# Altium PCB ETR_CELLMETER_MASTER.PcbDoc (part 1 of 3)
Units mm, origin at the board's own origin, x right, y up, seen from the top; angles counter-clockwise.
Board outline 110 x 70.06 mm, 4 copper layers (Top Layer, Top Inner, Bottom Inner, Bottom Layer), stack 0.96 mm thick; 181 components, 86 nets, 555 pads, 321 vias.
Unrouted connection lines stored in the file: 15.
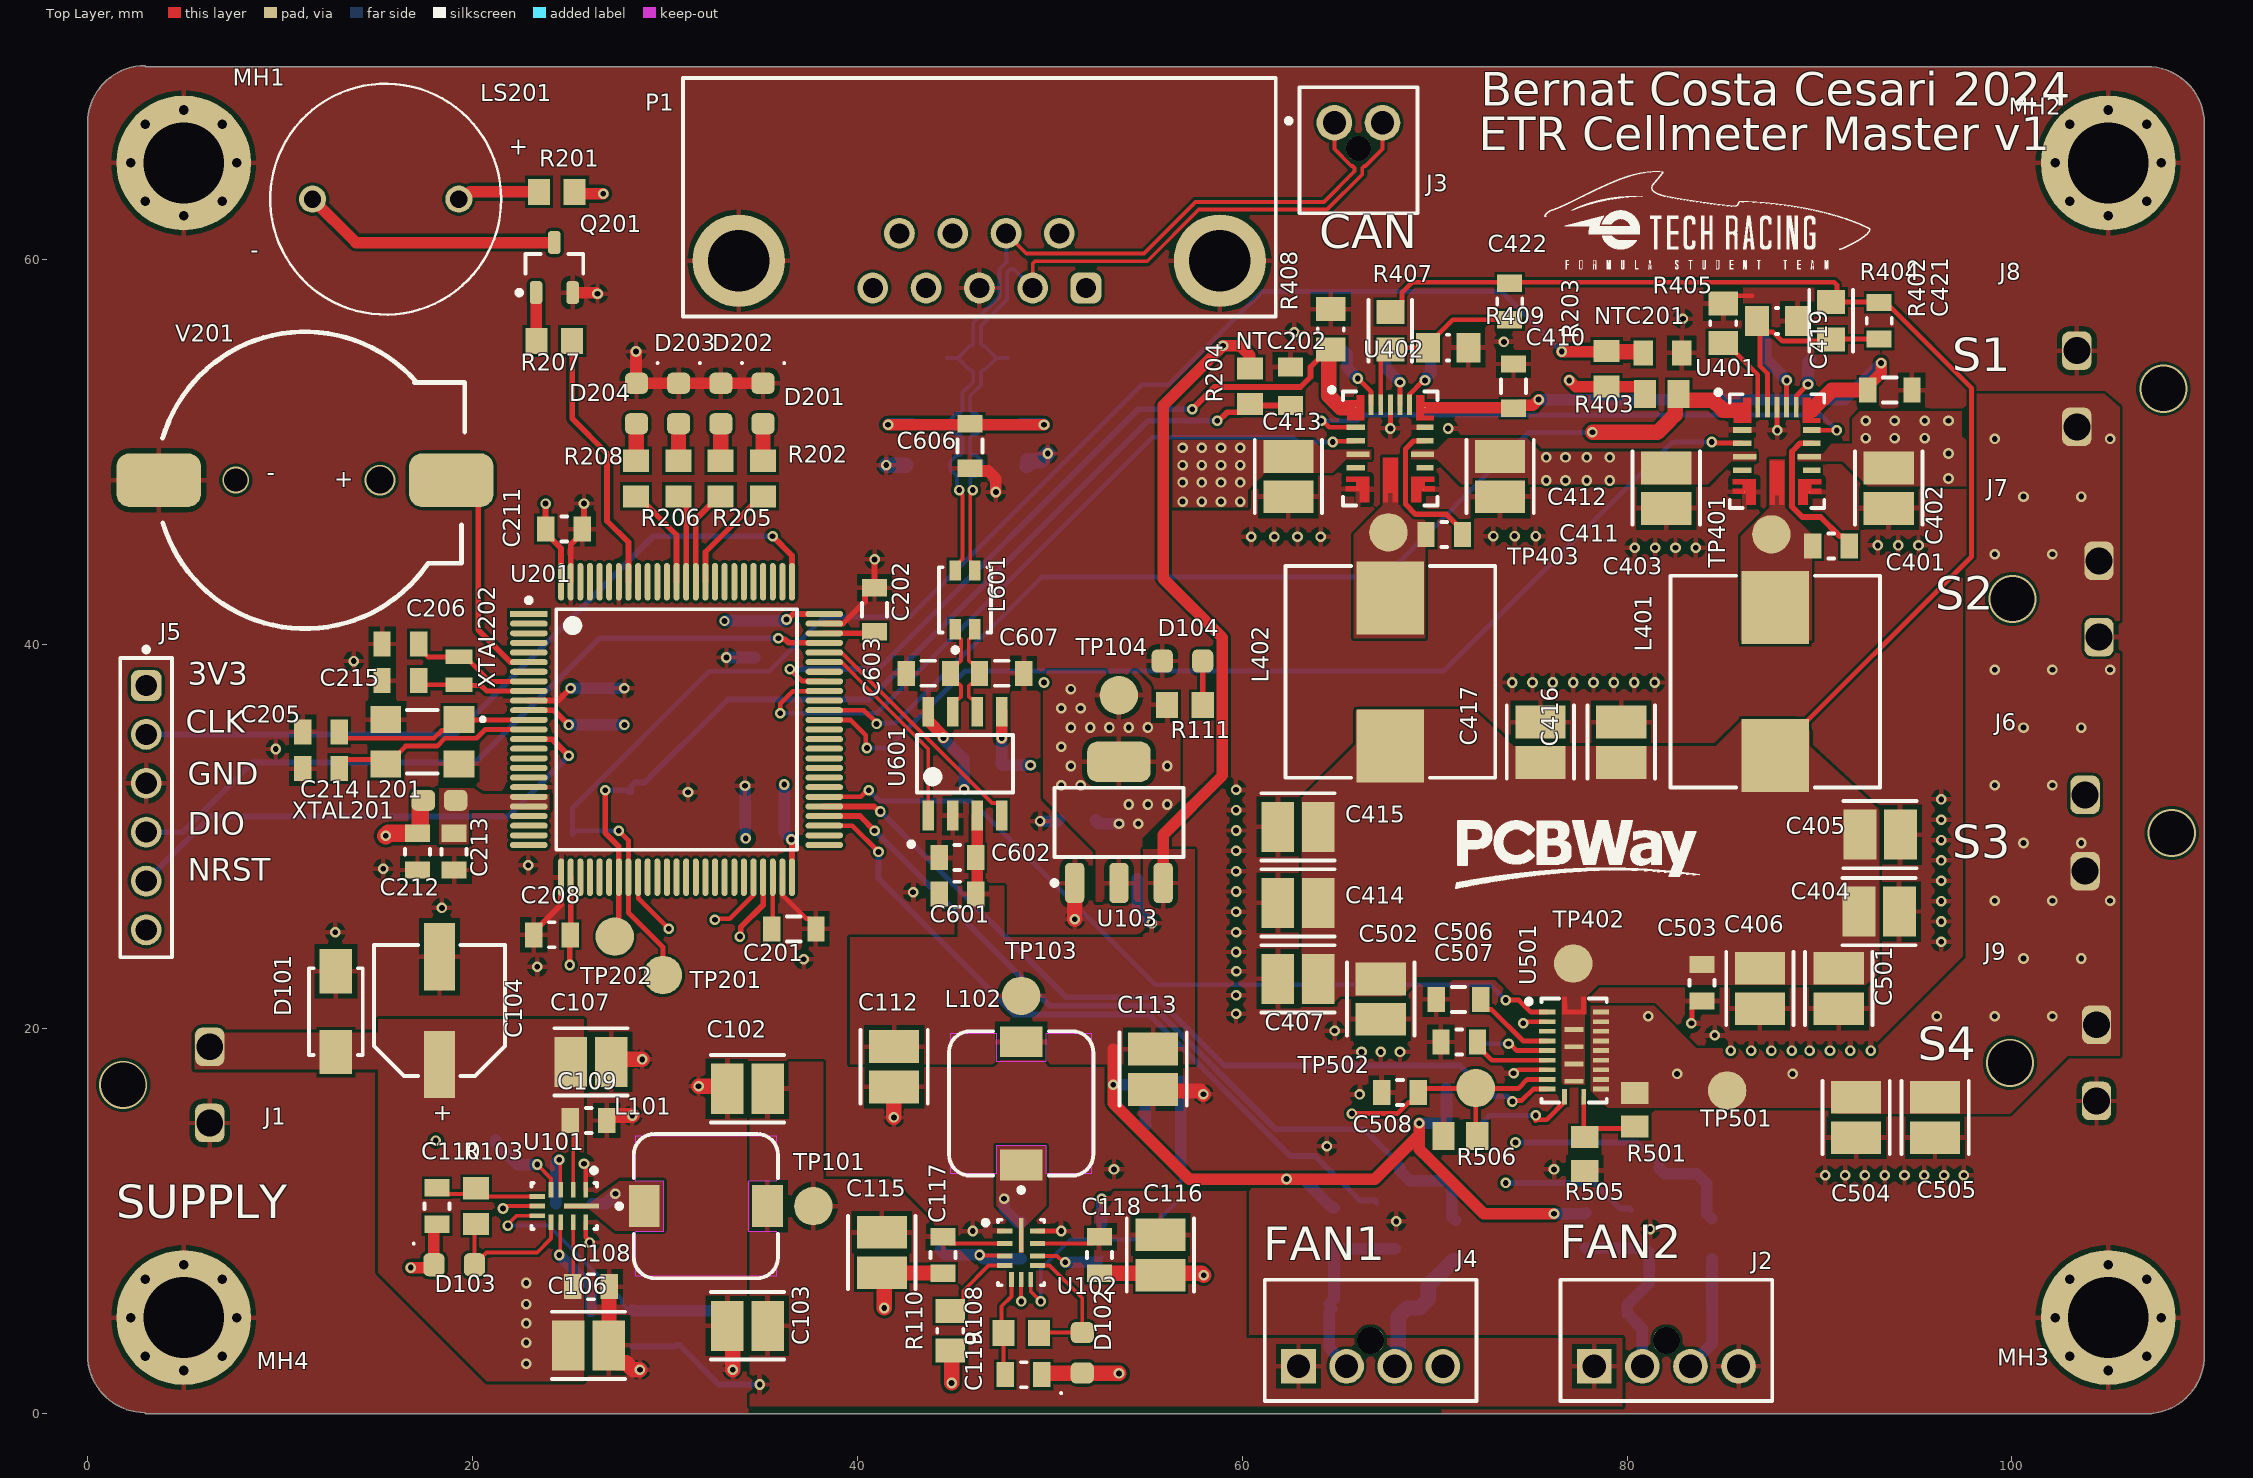
[diagram p0: Top Layer view]
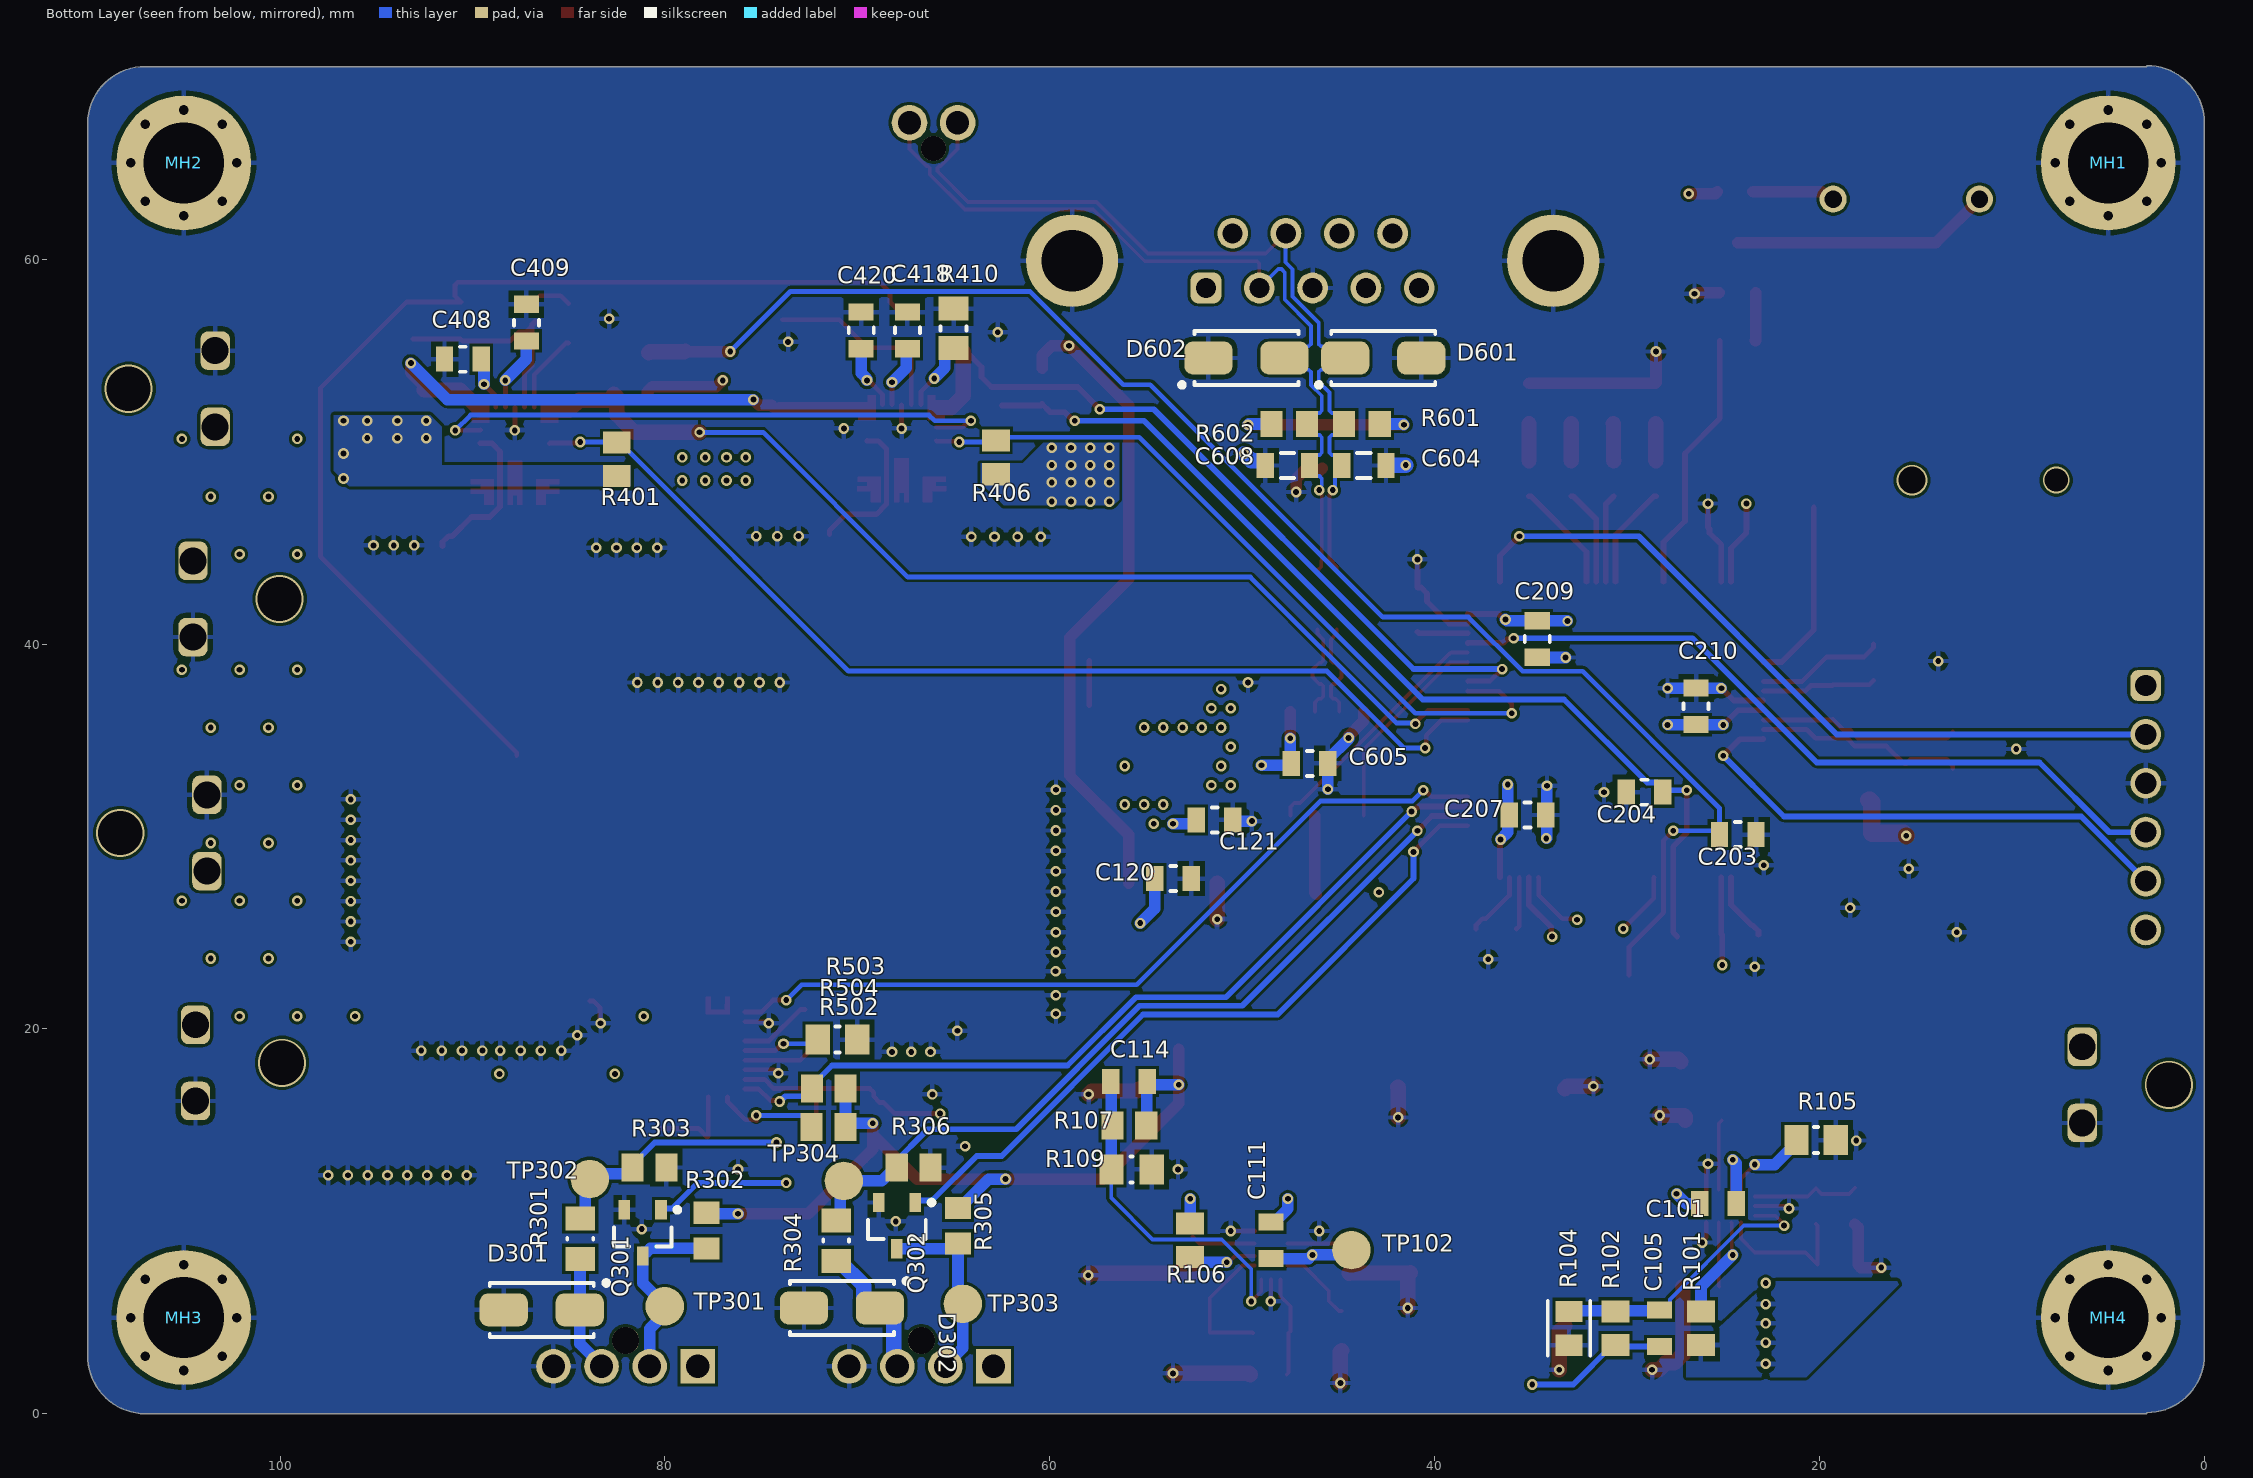
[diagram p1: Bottom Layer view, seen from below]
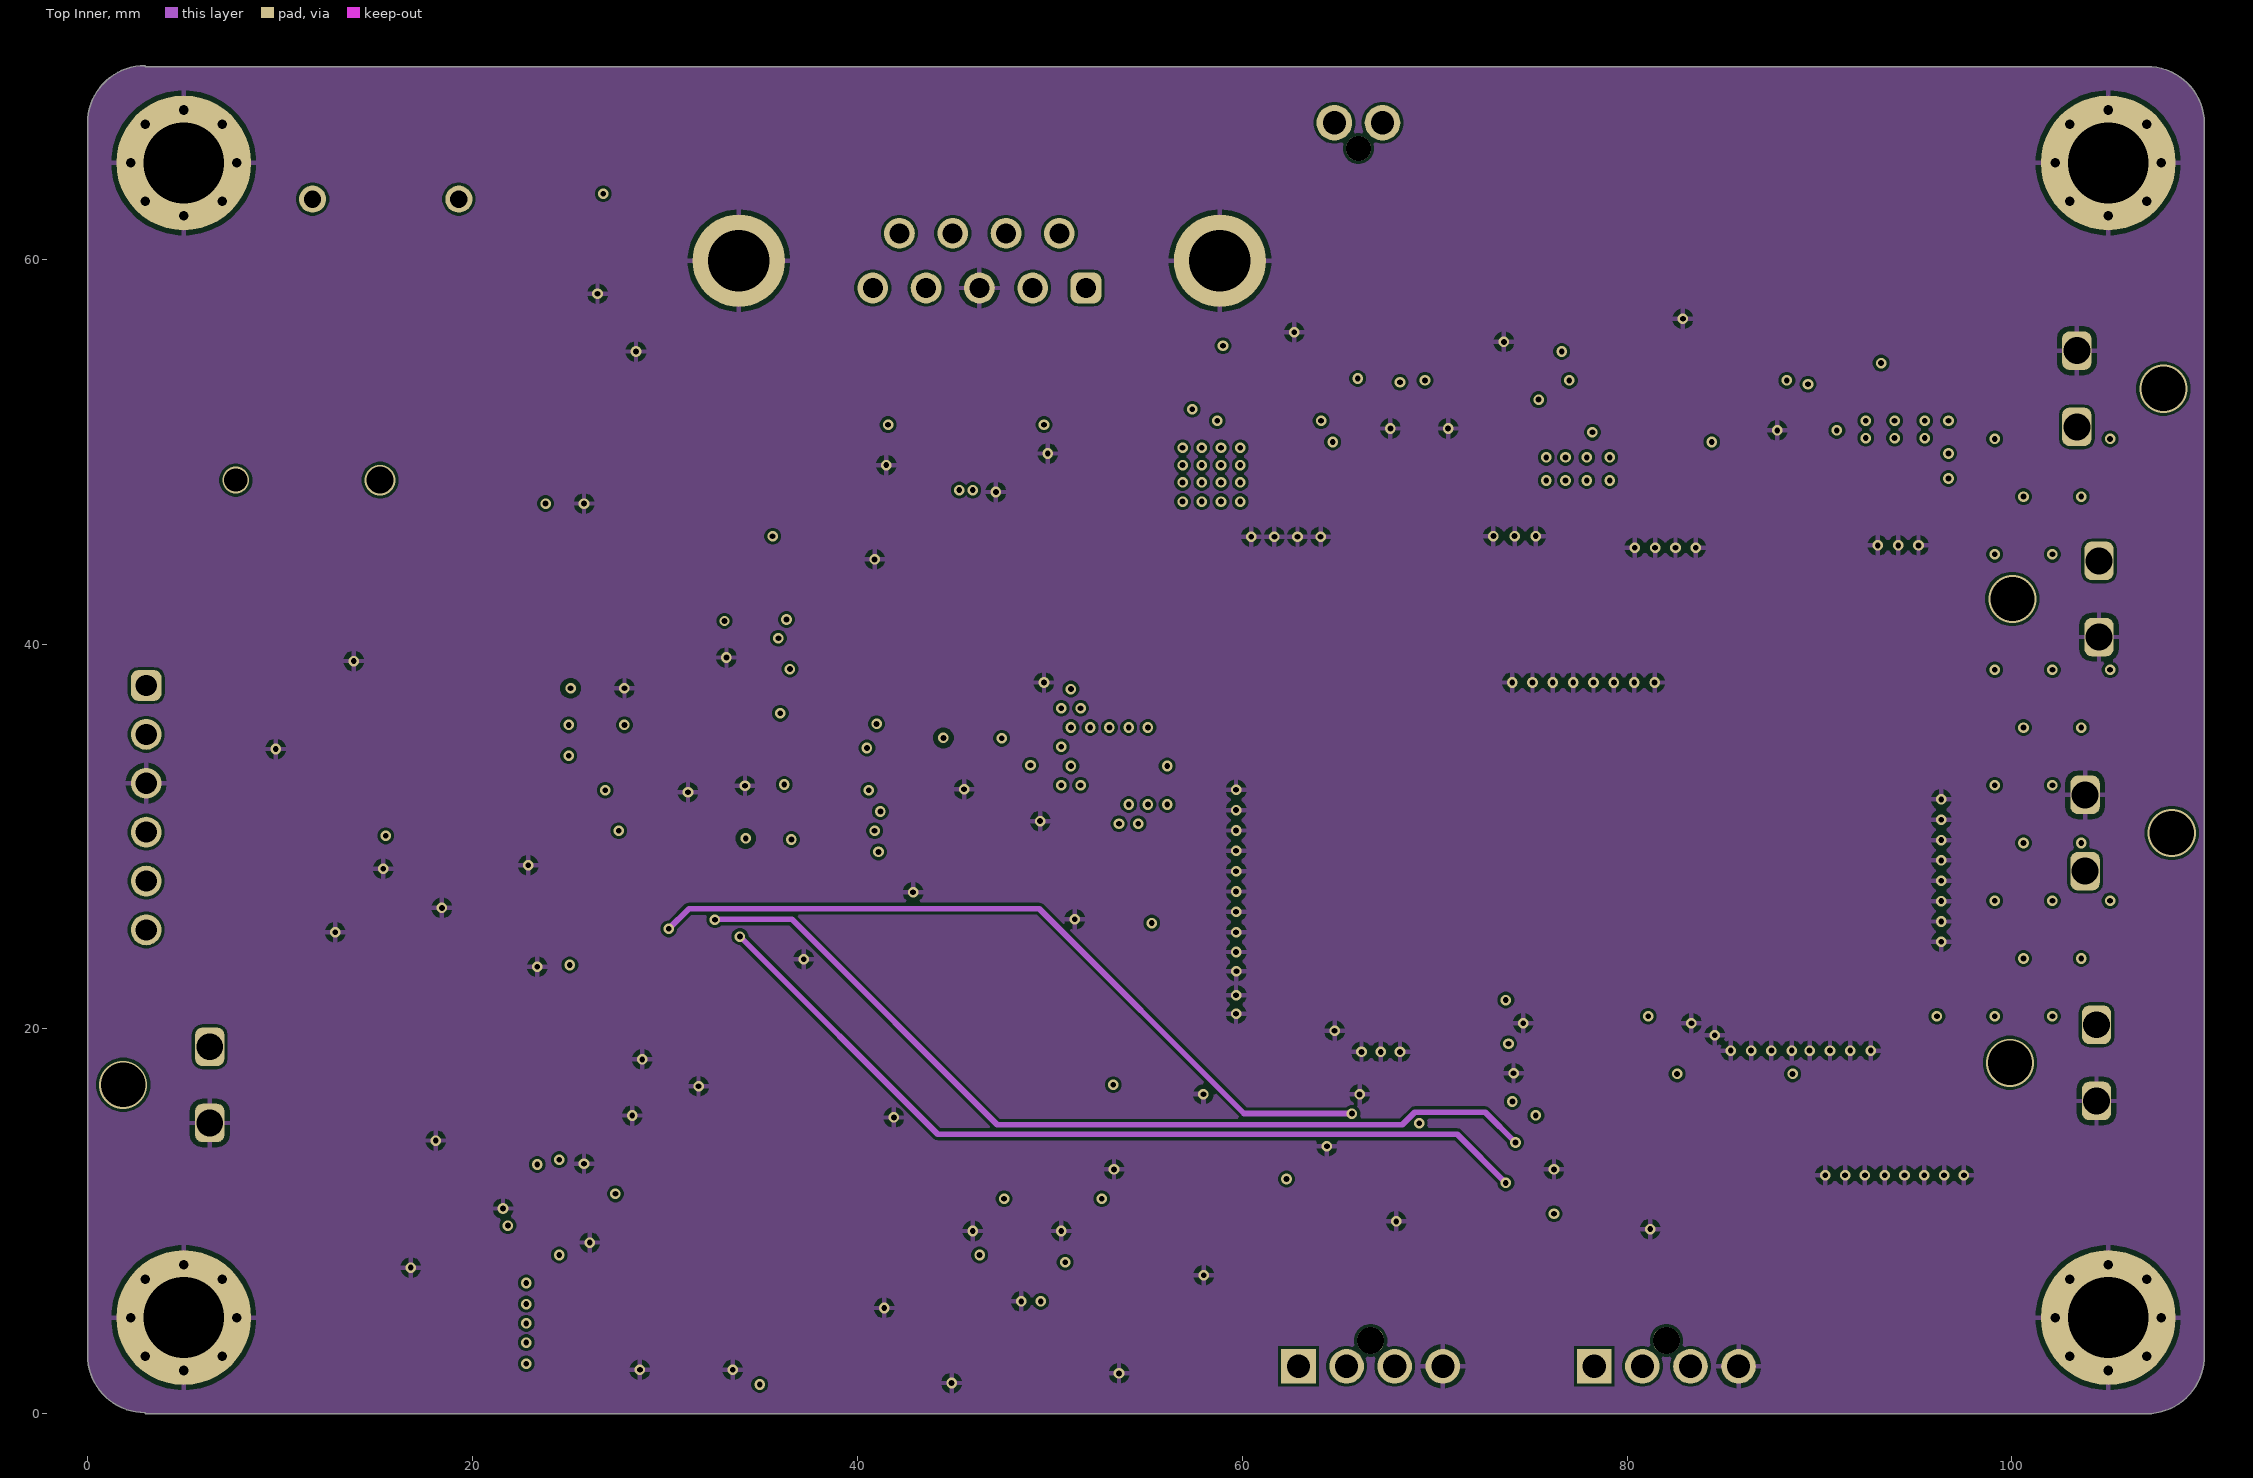
[diagram p2: Top Inner]
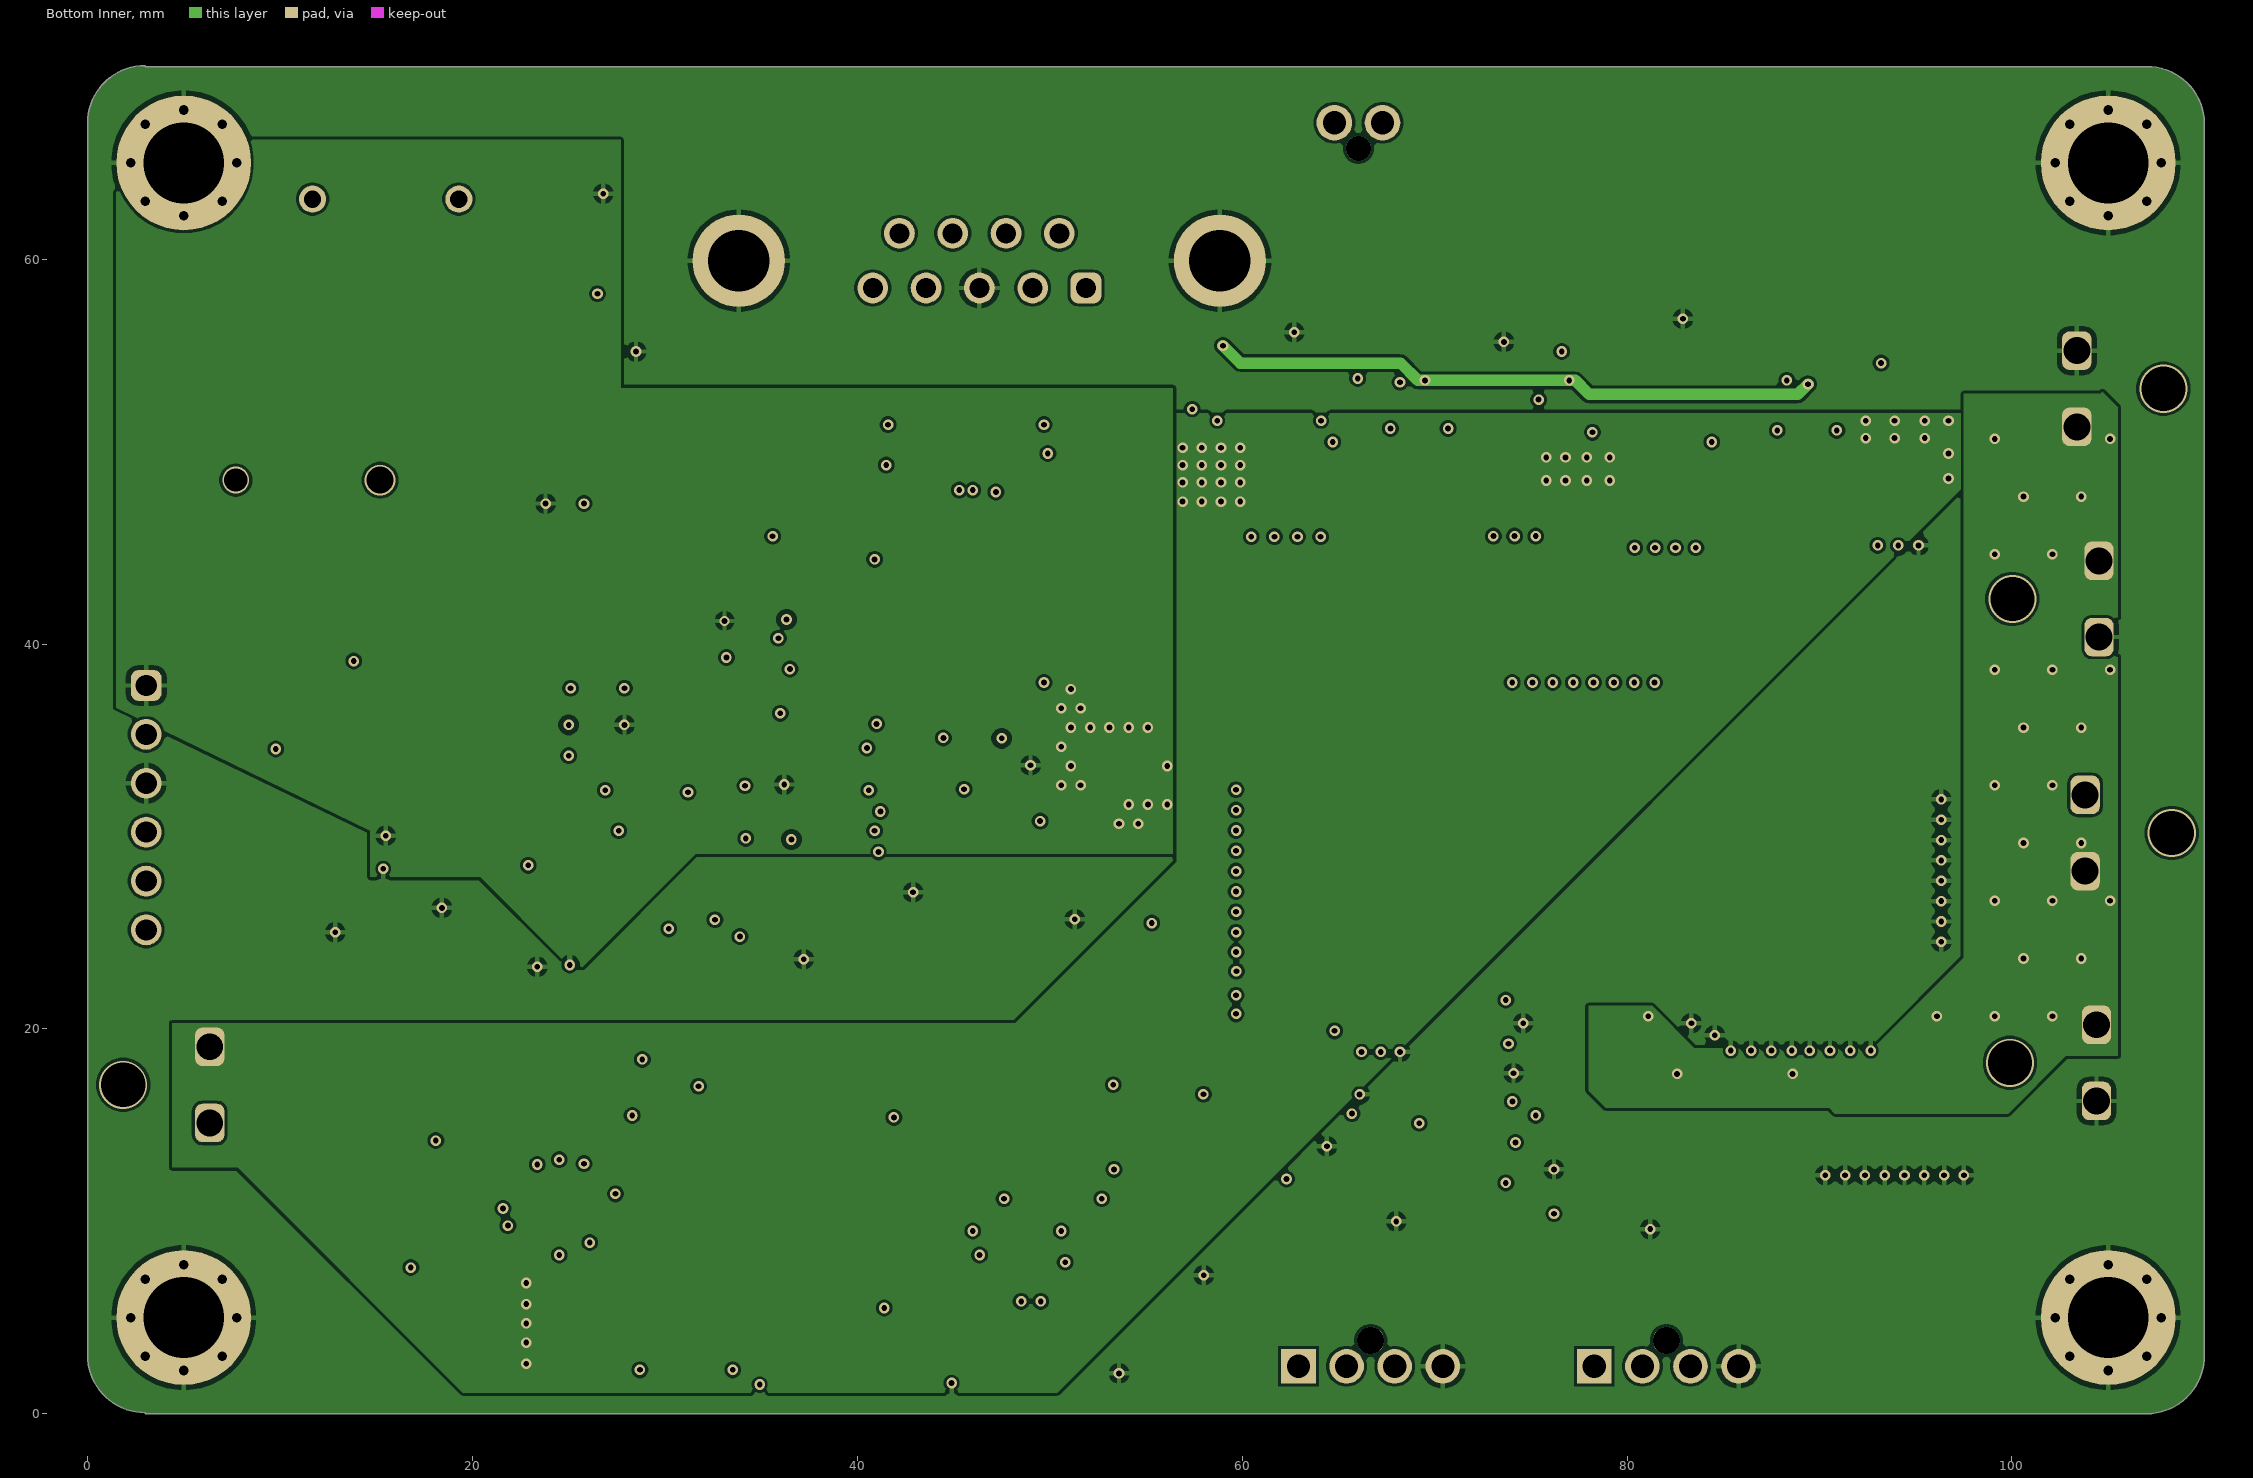
[diagram p3: Bottom Inner]
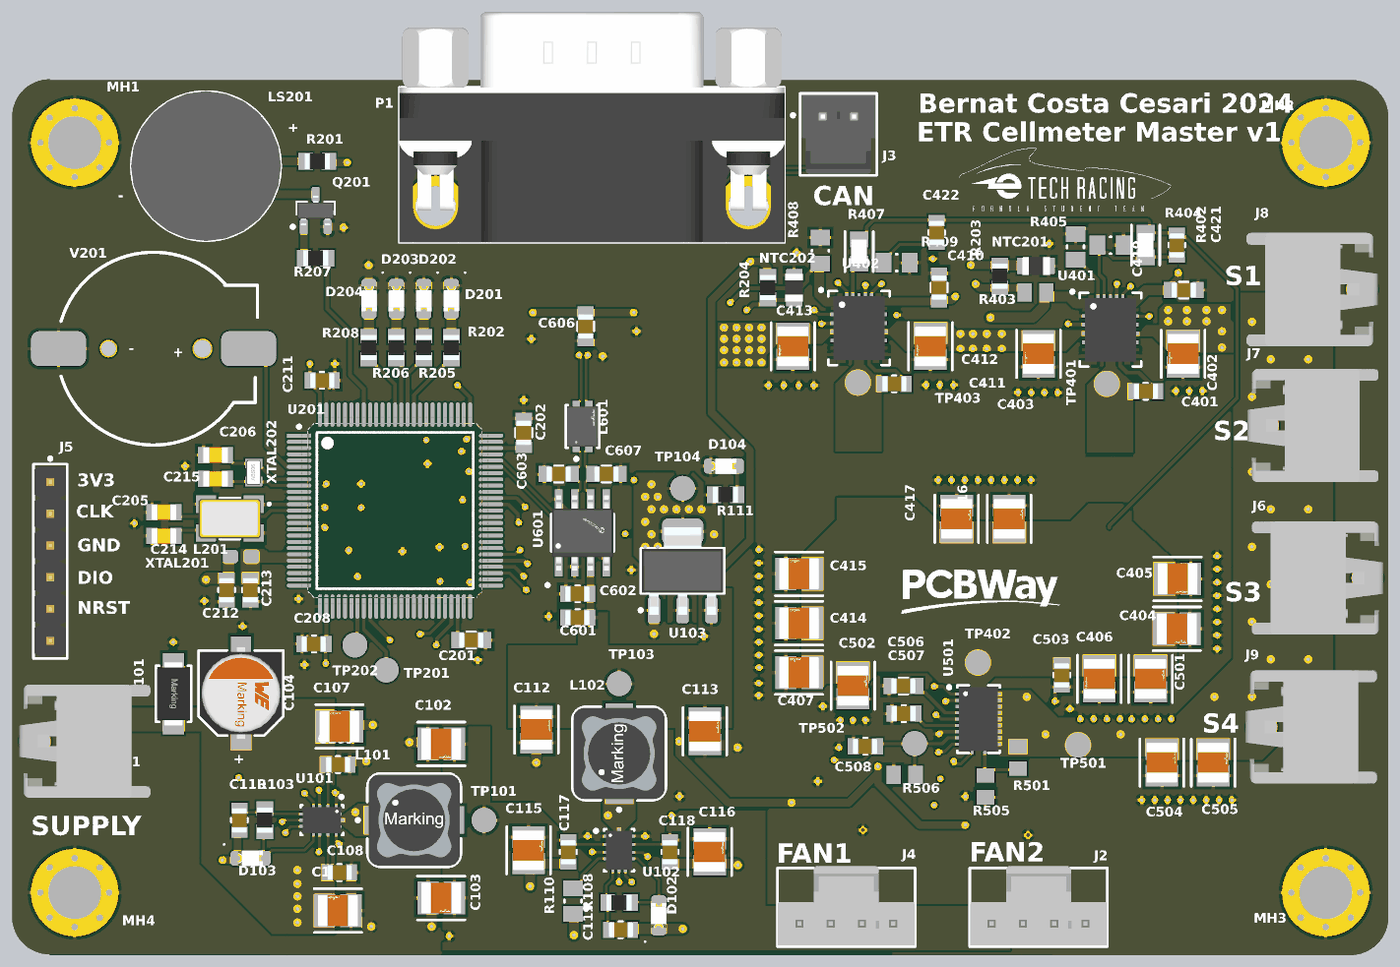
[diagram p5: 3D render of the assembled board from above, using the file's embedded part models]
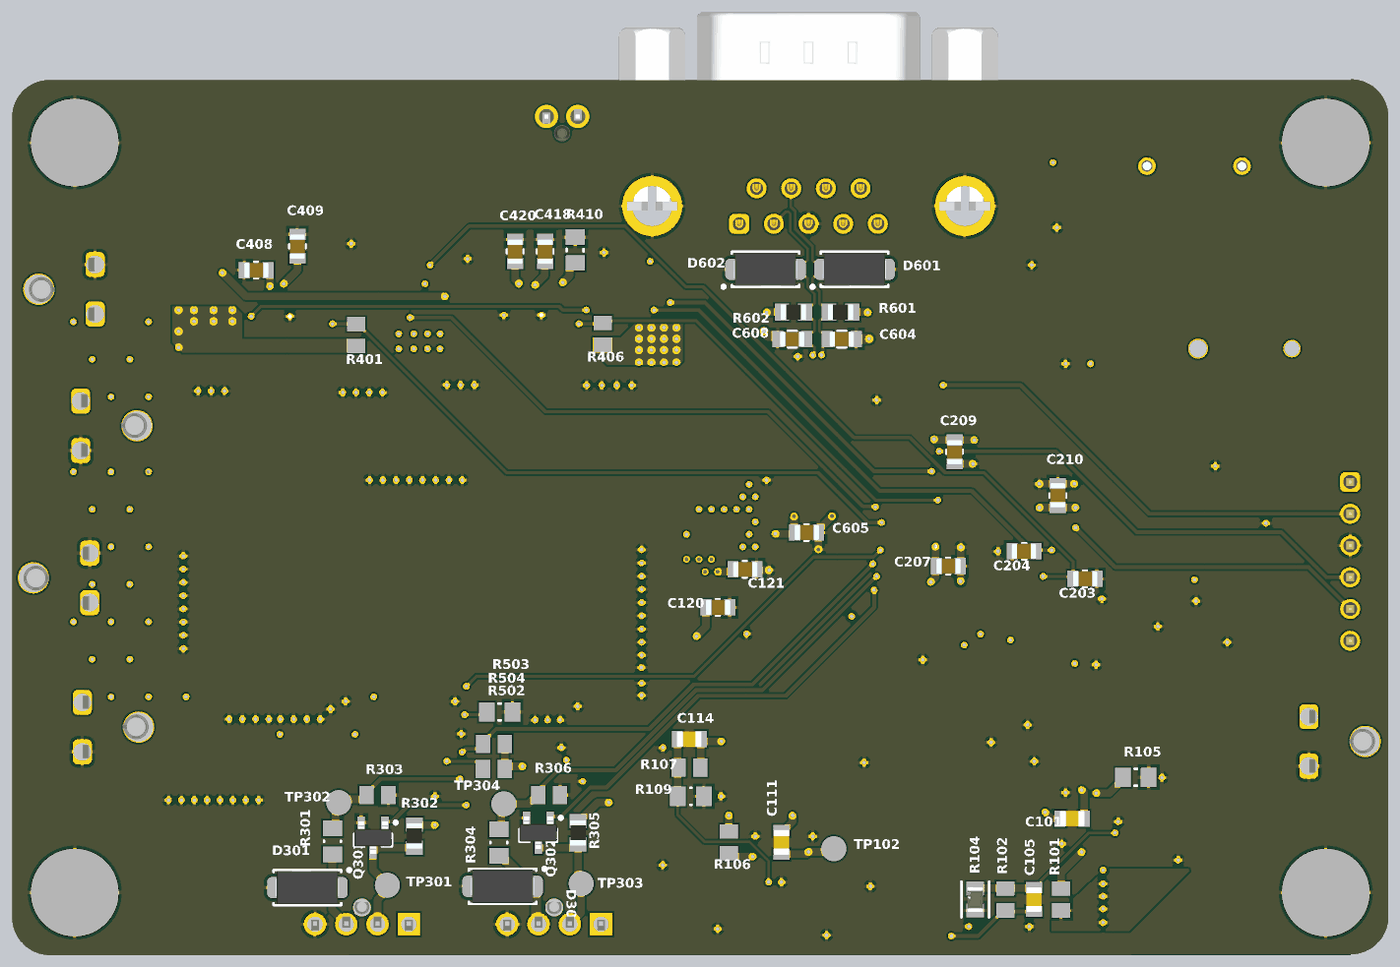
[diagram p6: 3D render of the assembled board from below, using the file's embedded part models]

## Layer stack, top to bottom
Top Solder: solder mask 0.01, Solder Resist, Dk 3.5
Top Layer: signal copper 0.035
Dielectric 4: core 0.11, Core-009, Dk 4.5
Top Inner: signal copper 0.035
Dielectric 1: dielectric 0.6, FR-4, Dk 4.8
Bottom Inner: signal copper 0.035
Dielectric 5: core 0.11, Core-009, Dk 4.5
Bottom Layer: signal copper 0.035
Bottom Solder: solder mask 0.01, Solder Resist, Dk 3.5

## Board outline
0,3.061 0,67.061 cw(c3,67.061) 3,70.061 3,70 107,70 cw(c107.03,67.03) 110,67.061 110,3.061 cw(c106.97,3.03) 107,0 3,0 3,0.061 cw(c3,3.061)

## Design rules (kind name [scope] priority, off if disabled: settings)
Clearance Clearance_1 [IsPad And InComponent('V1')] p1: gap=0 ignorepadtopadclearanceinfootprint=FALSE
Clearance [All] p2: gap=0.15 ignorepadtopadclearanceinfootprint=TRUE
DiffPairsRouting [All] p1: maxlimit=0.254 minlimit=0.2 mostfreqgap=0.254 toplayer_prefgap=0.2 toplayer_minwidth=0.2 toplayer_maxwidth=0.381 toplayer_prefwidth=0.2 midlayer1_mingap=0.254 midlayer1_minwidth=0.381 midlayer1_maxwidth=0.381 midlayer1_prefwidth=0.381 midlayer2_mingap=0.254 midlayer2_minwidth=0.381 midlayer2_maxwidth=0.381 midlayer2_prefwidth=0.381 bottomlayer_prefgap=0.2 bottomlayer_minwidth=0.2 bottomlayer_maxwidth=0.381 bottomlayer_prefwidth=0.2 maxuncoupledlength=12.7
HoleSize [All] p1: absolutevalues=TRUE maxlimit=6 minlimit=0.025 maxpercent=80.000 minpercent=20.000
HoleToHoleClearance [All] p1: gap=0.15 allowstackedmicrovias=TRUE
MinimumSolderMaskSliver [All] p1: minsoldermaskwidth=0.15
PolygonConnect PolygonDirect [Name Like '*_DIRECT'] p1: connectstyle=Direct reliefconductorwidth=0.254 reliefentries=4 polygonreliefangle="90 Angle" airgapwidth=0.254
PolygonConnect [All] p2: connectstyle=Relief reliefconductorwidth=0.254 reliefentries=4 polygonreliefangle="90 Angle" airgapwidth=0.254
RoutingVias [All] p1: holewidth=0.3 width=0.55 viastyle="Through Hole" minholewidth=0.3 minwidth=0.55 maxholewidth=0.7 maxwidth=1
SilkToSilkClearance [All] p1: silktosilkclearance=0
SilkToSolderMaskClearance [IsPad] p1: minsilkscreentomaskgap=0 clearancetoexposedcopper=TRUE
SolderMaskExpansion [All] p1: expansion=0.055 istentingtop=FALSE
SupplyNets "Schematic Supply Nets" [InNet('+12F')] p1: voltage=0.000
SupplyNets "Schematic Supply Nets_4" [InNet('+24')] p2: voltage=0.000
SupplyNets "Schematic Supply Nets_2" [InNet('+12S')] p3: voltage=0.000
SupplyNets "Schematic Supply Nets_11" [InNet('+12')] p4: voltage=0.000
SupplyNets "Schematic Supply Nets_9" [InNet('GND')] p5: voltage=0.000
SupplyNets "Schematic Supply Nets_7" [InNet('+5')] p6: voltage=0.000
SupplyNets "Schematic Supply Nets_6" [InNet('3V3_MCU')] p7: voltage=0.000
SupplyNets "Schematic Supply Nets_5" [InNet('3V3_A')] p8: voltage=0.000
Width [All] p1: maxlimit=5 minlimit=0.2 preferedwidth=0.2 minimp=50.000000 maximp=50.000000 favimp=50.000000
24 further rules are at their usual default settings.

## Classes and differential pairs
component class SS1: C401 C402 C403 C404 C405 C406 C407 C408 C409 C410 C411 C412 C413 C414 C415 C416 C417 C418 C419 C420 C421 C422 L401 L402 R401 R402 R403 R404 R405 R406 R407 R408 R409 R410 TP401 TP402 TP403 U401 U402
component class MCU: C201 C202 C203 C204 C205 C206 C207 C208 C209 C210 C211 C212 C213 C214 C215 D201 D202 D203 D204 L201 LS201 NTC201 NTC202 Q201 R201 R202 R203 R204 R205 R206 R207 R208 TP201 TP202 U201 V201 XTAL201 XTAL202
component class Master_Supply: C101 C102 C103 C104 C105 C106 C107 C108 C109 C110 C111 C112 C113 C114 C115 C116 C117 C118 C119 C120 C121 D101 D102 D103 D104 L101 L102 R101 R102 R103 R104 R105 R106 R107 R108 R109 R110 R111 TP101 TP102 TP103 TP104 U101 U102 U103
component class FUSE1: C501 C502 C503 C504 C505 C506 C507 C508 R501 R502 R503 R504 R505 R506 TP501 TP502 U501
component class ETR_CELLMETER_MASTER: J1 J2 J3 J4 J5 J6 J7 J8 J9 JS1 JS2 JS3 JS4 JS5 JS6 JS7 JS8 MH1 MH2 MH3 MH4 P1
component class Cooling: D301 D302 Q301 Q302 R301 R302 R303 R304 R305 R306 TP301 TP302 TP303 TP304
component class CAN: C601 C602 C603 C604 C605 C606 C607 C608 D601 D602 L601 R601 R602 U601
differential pair CAN_FIL: +CAN_FIL_H -CAN_FIL_L
differential pair CAN1: +CAN1_H -CAN1_L

## Components (designator, comment, footprint, x,y, rotation, side; value= is the part's Value field where it differs from the comment)
C101 "C47nF_0805" WCAP-CSGP_0805_L2W1.25H0.8_Reflow 25.273,10.922 r0 bottom value=47nF
C102 "C47µF" FP-GRM32E-0_3-0_2-IPC_C 34.29,16.891 r0 top value=47µF
C103 "C47µF 1210" FP-GRM32E-0_3-0_2-IPC_C 34.29,4.572 r0 top value=47µF
C104 "865080545011" WCAP-ASLI_D6.3H7.7 18.288,20.955 r270 top value=68µF
C105 "885012007051" WCAP-CSGP_0805_L2W1.25H0.6_Reflow 28.321,4.445 r270 bottom value=10pF
C106 "C47µF" FP-GRM32E-0_3-0_2-IPC_C 26.035,3.556 r180 top value=47µF
C107 "C47µF 1210" FP-GRM32E-0_3-0_2-IPC_C 26.162,18.288 r180 top value=47µF
C108 "C100n-50V-0805FNPC-X7R" C0805FNPC-R#1 26.162,6.604 r180 top value=100nF
C109 "C100n-50V-0805FNPC-X7R" C0805FNPC-R#1 26.035,15.24 r180 top value=100nF
C110 "C1u-50V-0805FNPC-X7R" C0805FNPC-R#1 18.161,10.795 r90 top value=1µF
C111 "885012207096" WCAP-CSGP_0805_L2W1.25H0.8_Reflow 48.514,9.017 r90 bottom value=47nF
C112 "C47µF" FP-GRM32E-0_3-0_2-IPC_C 41.91,18.034 r90 top value=47µF
C113 "C47µF 1210" FP-GRM32E-0_3-0_2-IPC_C 55.372,17.907 r90 top value=47µF
C114 "C10pF_0805_50V" WCAP-CSGP_0805_L2W1.25H0.6_Reflow 55.88,17.272 r180 bottom value=10pF
C115 "C47µF" FP-GRM32E-0_3-0_2-IPC_C 41.275,8.382 r90 top value=47µF
C116 "C47µF 1210" FP-GRM32E-0_3-0_2-IPC_C 55.753,8.255 r90 top value=47µF
C117 "C100n-50V-0805FNPC-X7R" C0805FNPC-R#1 44.45,8.255 r90 top value=100nF
C118 "C100n-50V-0805FNPC-X7R" C0805FNPC-R#1 52.578,8.255 r90 top value=100nF
C119 "C1u-50V-0805FNPC-X7R" C0805FNPC-R#1 48.641,2.032 r180 top value=1µF
C120 "C10u 0805" C0805FNPC-R#1 53.594,27.813 r0 bottom value=10µF
C121 "C10u 0805" C0805FNPC-R#1 51.435,30.861 r0 bottom value=10µF
C201 "2,2uF 0805" C0805FNPC-W 36.7,25.2 r0 top value=22µF
C202 "2,2uF 0805" C0805FNPC-W 40.894,41.783 r90 top value=22µF
C203 "C100n 0805" C0805FNPC-R#1 24.25,30.1 r0 bottom value=100nF
C204 "C100n 0805" C0805FNPC-R#1 29.1,32.3 r180 bottom value=100nF
C205 "C10pF_0805_50V" WCAP-CSGP_0805_L2W1.25H0.6_Reflow 12.131,35.433 r0 top
C206 "C10pF_0805_50V" WCAP-CSGP_0805_L2W1.25H0.6_Reflow 16.256,40.005 r0 top
C207 "C100n-50V-0805FNPC-X7R" C0805FNPC-R#1 35.179,31.115 r0 bottom value=100nF
C208 "C100n-50V-0805FNPC-X7R" C0805FNPC-R#1 24.13,24.892 r0 top value=100nF
C209 "C100n-50V-0805FNPC-X7R" C0805FNPC-R#1 34.671,40.259 r90 bottom value=100nF
C210 "C100n-50V-0805FNPC-X7R" C0805FNPC-R#1 26.416,36.765 r270 bottom value=100nF
C211 "C100n 0805" C0805FNPC-R#1 24.765,45.974 r180 top value=100nF
C212 "C100n 0805" C0805FNPC-R#1 17.145,29.21 r90 top value=100nF
C213 "C100n-50V-0805FNPC-X7R" C0805FNPC-R#1 19.05,29.21 r90 top value=100nF
C214 "C10pF 0805" WCAP-CSGP_0805_L2W1.25H0.6_Reflow 12.131,33.528 r0 top
C215 "C10pF 0805" WCAP-CSGP_0805_L2W1.25H0.6_Reflow 16.256,38.1 r0 top
C401 "C100n-50V-0805FNPC-X7R" C0805FNPC-R#1 90.6,45.1 r180 top value=100nF
C402 "GRM32EC81A476KE19L" FP-GRM32E-0_3-0_2-IPC_C 93.6,48.1 r270 top value=47µF
C403 "GRM32EC81A476KE19L" FP-GRM32E-0_3-0_2-IPC_C 82.038,48.1 r270 top value=47µF
C404 "GRM32EC81A476KE19L" FP-GRM32E-0_3-0_2-IPC_C 93.1,26.1 r0 top value=47µF
C405 "GRM32EC81A476KE19L" FP-GRM32E-0_3-0_2-IPC_C 93.151,30.1 r0 top value=47µF
C406 "GRM32EC81A476KE19L" FP-GRM32E-0_3-0_2-IPC_C 86.9,22.1 r270 top value=47µF
C407 "GRM32EC81A476KE19L" FP-GRM32E-0_3-0_2-IPC_C 62.9,22.6 r180 top value=47µF
C408 "C1u-50V-0805FNPC-X7R" C0805FNPC-R#1 90.5,54.8 r0 bottom value=1µF
C409 "C100n-50V-0805FNPC-X7R" C0805FNPC-R#1 87.2,56.7 r90 bottom value=100nF
C410 "C180pF 0805" C0805FNPC-W 74.1,53.4 r270 top value=100pF
C411 "C100n-50V-0805FNPC-X7R" C0805FNPC-R#1 70.5,45.7 r180 top value=100nF
C412 "GRM32EC81A476KE19L" FP-GRM32E-0_3-0_2-IPC_C 73.4,48.7 r270 top value=47µF
C413 "GRM32EC81A476KE19L" FP-GRM32E-0_3-0_2-IPC_C 62.4,48.7 r270 top value=47µF
C414 "GRM32EC81A476KE19L" FP-GRM32E-0_3-0_2-IPC_C 62.9,26.55 r180 top value=47µF
C415 "GRM32EC81A476KE19L" FP-GRM32E-0_3-0_2-IPC_C 62.9,30.5 r180 top value=47µF
C416 "GRM32EC81A476KE19L" FP-GRM32E-0_3-0_2-IPC_C 79.7,34.9 r90 top value=47µF
C417 "GRM32EC81A476KE19L" FP-GRM32E-0_3-0_2-IPC_C 75.5,34.9 r90 top value=47µF
C418 "C100n-50V-0805FNPC-X7R" C0805FNPC-R#1 67.4,56.3 r90 bottom value=100nF
C419 "C180pF" C0805FNPC-W 93.65,53.2 r180 top value=100pF
C420 "C1u-50V-0805FNPC-X7R" C0805FNPC-R#1 69.8,56.3 r90 bottom value=1µF
C421 "C15p" C0805FNPC-R#2 93.1,56.8 r90 top value=15pF
C422 "C15p" C0805FNPC-R#2 73.9,57.8 r90 top value=15pF
C501 "C47µF-10V-1210" FP-GRM32E-0_3-0_2-IPC_C 91,22.1 r90 top value=47µF
C502 "C47µF 1210" FP-GRM32E-0_3-0_2-IPC_C 67.2,21.551 r90 top value=47µF
C503 "C100n 0805" C0805FNPC-R#1 83.9,22.4 r90 top value=100nF
C504 "C47µF 1210" FP-GRM32E-0_3-0_2-IPC_C 91.9,15.4 r90 top value=47µF
C505 "C47µF 1210" FP-GRM32E-0_3-0_2-IPC_C 96,15.4 r90 top value=47µF
C506 "C220n 0805" C0805FNPC-W 71.239,21.528 r0 top value=220nF
C507 "C10n 0805" C0805FNPC-R#1 71.276,19.32 r0 top value=10nF
C508 "C100n 0805" C0805FNPC-R#1 68.2,16.7 r0 top value=100nF
C601 "C100n-50V-0805FNPC-X7R" C0805FNPC-R#1 45.2,27 r0 top value=100nF
C602 "C100n-50V-0805FNPC-X7R" C0805FNPC-R#1 45.2,28.9 r0 top value=100nF
C603 "C100p-50V-0805FNPC-C0G/NP0" C0805FNPC-W 43.688,38.481 r180 top value=100pF
C604 "C100p-50V-0805FNPC-C0G/NP0" C0805FNPC-W 43.681,49.276 r0 bottom value=100pF
C605 "C100n-50V-0805FNPC-X7R" C0805FNPC-R#1 46.5,33.8 r0 bottom value=100nF
C606 "C100p-50V-0805FNPC-C0G/NP0" C0805FNPC-W 45.847,50.292 r270 top value=100pF
C607 "C100p-50V-0805FNPC-C0G/NP0" C0805FNPC-W 47.498,38.481 r180 top value=100pF
C608 "C100p-50V-0805FNPC-C0G/NP0" C0805FNPC-W 47.651,49.276 r0 bottom value=100pF
D101 "TVS 33V 400W" WE-TVSP_DO-214AC_Bidirectional 12.9,20.9 r270 top
D102 "150080VS75000" LED_0805_WE 51.689,3.175 r90 top
D103 "150080VS75000" LED_0805_WE 19.05,7.747 r0 top
D104 "150080VS75000" LED_0805_WE 56.896,39.116 r0 top
D201 "LEDBS-0805-145" LED_0805_WE 35.1,52.5 r270 top
D202 "LEDBS-0805-145" LED_0805_WE 32.908,52.5 r270 top
D203 "LEDBS-0805-145" LED_0805_WE 30.717,52.5 r270 top
D204 "LEDBS-0805-145" LED_0805_WE 28.525,52.5 r270 top
D301 "TVS 6V" DTVS-DO-214AC 86.4,5.4 r180 bottom
D302 "TVS 6V" DTVS-DO-214AC 70.8,5.5 r180 bottom
D601 "TVS 6V" DTVS-DO-214AC 42.672,54.864 r0 bottom
D602 "TVS 6V" DTVS-DO-214AC 49.784,54.864 r0 bottom
J1 "J_2x1_14A_TE" 179838-2 6.35,15.113 r90 top
J2 "NanoFit 1x4" J_NanoFit_1x4_V 82.042,2.47 r180 top
J3 "J_NanoFit_1x2" FP-105309-1102-MFG 66.04,65.659 r0 top
J4 "NanoFit 1x4" J_NanoFit_1x4_V 66.675,2.47 r180 top
J5 "ST Link" J_STLink_PinHeader 3.048,31.496 r270 top
J6 "J_2x1_14A_TE" 179838-2 103.8,32.16 r270 top
J7 "J_2x1_14A_TE" 179838-2 104.521,40.363 r90 top
J8 "J_2x1_14A_TE" 179838-2 103.369,55.245 r270 top
J9 "J_2x1_14A_TE" 179838-2 104.394,16.256 r90 top
L101 "L3.3uH" WE-PD_7345 32.131,10.795 r0 top
L102 "L2.2uH" WE-PD_7345 48.514,16.129 r90 top
L201 "Ferrite bead 782853561" L_Ferrite_bead_0805 18.288,31.877 r0 top
L401 "1uH 14A" WE-HCI_1030 1357.7,1308.05 r0 top
L402 "1uH 14A" WE-HCI_1030 1337.7,1308.55 r0 top
L601 "DLW32SH510XF2L" FP-DLW32PH-MFG 45.593,42.291 r90 top
LS201 "Buzzer_CMI-1275C-050" CUI_CMI-1275C-050 15.494,63.119 r180 top value=0µH
MH1 "Mounting_Hole_M4" Mounting_Hole_M4 5,65 r0 top locked
MH2 "Mounting_Hole_M4" Mounting_Hole_M4 105,65 r0 top locked
MH3 "Mounting_Hole_M4" Mounting_Hole_M4 105,5 r0 top locked
MH4 "Mounting_Hole_M4" Mounting_Hole_M4 5,5 r0 top locked
NTC201 "NTC SMD 0805" RESC2012X10N 81.839,55.128 r180 top
NTC202 "NTC SMD 0805" RESC2012X10N 62.5,53.4 r270 top
P1 "CAN case connector" 618009231221 46.343,63.221 r180 top
Q201 "TRT-NPN-0.5/45-SOT23" TRT-NPN-0.5/45-SOT23 24.257,59.563 r90 top
Q301 "SQ2318CES-T1_GE3" SOT95P245X110-3N 81.153,9.398 r270 bottom
Q302 "SQ2318CES-T1_GE3" SOT95P245X110-3N 67.945,9.779 r270 bottom
R101 "R100k-0805" RESC2013X70X40NL20T20 26.162,4.445 r270 bottom value=100k
R102 "R100k-0805" RESC2013X70X40NL20T20 30.607,4.445 r270 bottom value=100k
R103 "R1k-0805FTK" R0805FTK 20.193,10.795 r270 top value=1k
R104 "R7.15k" FP-RN732A-IPC_B 33.02,4.445 r90 bottom value=7.15k
R105 "R15K-0805" RESC2013X50X30ML20T20 20.184,14.224 r0 bottom value=15k
R106 "R100k-0805" RESC2013X70X40NL20T20 52.705,9.017 r90 bottom value=100k
R107 "R100k-0805" RESC2013X70X40NL20T20 55.866,14.986 r180 bottom value=100k
R108 "R1k-0805FTK" R0805FTK 48.514,4.191 r0 top value=1k
R109 "R19.1k_0805" 0805#1 55.753,12.7 r0 bottom value=19.1k
R110 "R15K-0805" RESC2013X50X30ML20T20 44.831,4.318 r90 top value=15k
R111 "CR0805-FX-1000ELF" R0805FTK 57.023,36.83 r180 top
R201 "R470 0805" R0805FTK 24.384,63.5 r0 top value=470
R202 "R470 0805" R0805FTK 35.1,48.6 r90 top value=470
R203 "R10k 0805" R0805FTK 78.939,54.303 r270 top value=10k
R204 "R10k 0805" R0805FTK 60.4,53.4 r90 top value=10k
R205 "R470 0805" R0805FTK 32.9,48.6 r90 top value=470
R206 "R470 0805" R0805FTK 30.7,48.6 r90 top value=470
R207 "R10k 0805" R0805FTK 24.257,55.753 r180 top value=10k
R208 "R470 0805" R0805FTK 28.5,48.6 r90 top value=470
R301 "R51k_0805" 0805#1 84.4,9.1 r270 bottom value=57k
R302 "R10k 0805" R0805FTK 77.851,9.525 r90 bottom value=10k
R303 "R100k-0805" RESC2013X70X40NL20T20 80.8,12.8 r0 bottom value=100k
R304 "R51k_0805" 0805#1 71.1,9 r270 bottom value=57k
R305 "R10k 0805" R0805FTK 64.77,9.779 r90 bottom value=10k
R306 "R100k-0805" RESC2013X70X40NL20T20 67.075,12.8 r0 bottom value=100k
R401 "ERJ-6GEYJ104V" RESC2013X70X40NL20T20 82.5,49.6 r90 bottom value=100k
R402 "R60.4K-0805" FP-CR0805-IPC_A 90.6,56.8 r270 top value=100k
R403 "ERJ-6GEYJ104V" RESC2013X70X40NL20T20 81.8,53 r0 top value=100k
R404 "R5.3k" 0805#2 87.792,56.789 r90 top value=5.3k
R405 "R15K-0805" RESC2013X50X30ML20T20 84.998,56.662 r90 top value=15k
R406 "ERJ-6GEYJ104V" RESC2013X70X40NL20T20 62.8,49.7 r90 bottom value=100k
R407 "R60.4K-0805" FP-CR0805-IPC_A 67.7,56.277 r270 top value=100k
R408 "0805" 0805#3 64.6,56.35 r0 top value=R12.4k
R409 "R5.3k" 0805#2 70.7,55.4 r90 top value=5.3k
R410 "R15K-0805" RESC2013X50X30ML20T20 65,56.4 r90 bottom value=15k
R501 "R100k 0805" RESC2013X70X40NL20T20 80.4,15.8 r90 top value=100k
R502 "R100k 0805" RESC2013X70X40NL20T20 71.5,14.9 r180 bottom value=100k
R503 "R7k5 0805" RESC2013X50X30ML20T20 71.031,19.447 r0 bottom value=15k
R504 "R100k 0805" RESC2013X70X40NL20T20 71.481,16.907 r180 bottom value=100k
R505 "R5k2 0805" RESC2013X70X40NL20T20 77.8,13.5 r90 top value=100k
R506 "R22k 0805" RESC2013X70X40NL20T20 71.339,14.428 r0 top value=100k
R601 "R60-0805FTN" R0805FTK 43.781,51.435 r0 bottom value="60.4R 0805"
R602 "R60-0805FTN" R0805FTK 47.551,51.435 r0 bottom value="60.4R 0805"
TP101 "TestPoint" TestPoint 37.719,10.795 r270 top
TP102 "TestPoint" TestPoint 44.323,8.509 r180 bottom
TP103 "TestPoint" TestPoint 48.514,21.717 r0 top
TP104 "TestPoint" TestPoint 53.594,37.338 r0 top
TP201 "TestPoint" TestPoint 29.9,22.8 r0 top
TP202 "TestPoint" TestPoint 27.4,24.8 r0 top
TP301 "TestPoint" TestPoint 80.01,5.588 r180 bottom
TP302 "TestPoint" TestPoint 83.9,12.2 r180 bottom
TP303 "TestPoint" TestPoint 64.516,5.715 r90 bottom
TP304 "TestPoint" TestPoint 70.7,12.1 r90 bottom
TP401 "TestPoint" TestPoint 87.5,45.7 r270 top
TP402 "TestPoint" TestPoint 77.2,23.4 r270 top
TP403 "TestPoint" TestPoint 67.6,45.8 r90 top
TP501 "TestPoint" TestPoint 85.2,16.8 r270 top
TP502 "TestPoint" TestPoint 72.139,16.928 r270 top
U101 "MPQ4323GDE-AEC1" MPQ4323 24.765,10.795 r270 top
U102 "MPQ4323GDE-AEC1" MPQ4323 48.514,8.382 r0 top
U103 "LM1117IMP-3.3/NOPB" LDO_10V-0.8/3V3-SOT223 53.594,30.734 r90 top
U201 "STM32H750VBT6" FP-LQFP100-1L-IPC_A 30.607,35.56 r0 top locked
U401 "MPQ4371" MPQ4371-AEQ1 87.789,50.028 r0 top
U402 "MPQ4371" MPQ4371-AEQ1 67.7,50.161 r0 top
U501 "MPQ5069GQV-AEC1" QFN127P600-8N 77.245,18.877 r0 top
U601 "ATA6561-GAQW-N" FP-C04-057-OA-MFG 45.593,33.782 r90 top
V201 "Portapilas CR1220" "Portapilas CR1220-Footprint-1" 11.303,48.514 r0 top
XTAL201 "830030819" WE-XTAL_CFPX-104 17.399,34.925 r180 top
XTAL202 "XTAL_SMD_32.768kHz" XTAL_ABS06-32.768KHZ-9-T 19.304,38.608 r90 top

## Footprints (in the part's own frame and the unit in brackets; to place one, negate y for a bottom-side part, rotate by r counter-clockwise, add the part's x,y. Pads: shape width x height; smd on the part's side, far side on the other; paste and mask are expansions set on the pad)
0805#1 [mm] "Chip Resistor, 2-Leads, Body 2,60x1,50mm, IPC Medium Density"
  rect 1.25x1.55 smd mask+0.055: 1(-1.05,0) 2(1.05,0)
  silkscreen extent -0.05,-0.67 0.05,0.67, body extent -1.3,-0.75 1.3,0.75, height 0.6
0805#2 [mm] "Chip Resistor, 2-Leads, Body 2,60x1,50mm, IPC Medium Density"
  rect 1.55x1.25 smd: 1(0,-1.05) 2(0,1.05)
  silkscreen extent -0.67,-0.05 0.67,0.05, body extent -0.75,-1.3 0.75,1.3, height 0.6
0805#3 [mm] "Chip Resistor, 2-Leads, Body 2,60x1,50mm, IPC Medium Density"
  rect 1.55x1.25 smd mask+0.055: 1(0,-1.05) 2(0,1.05)
  silkscreen extent -0.67,-0.05 0.67,0.05, body extent -0.75,-1.3 0.75,1.3, height 0.6
179838-2 [mm] "179838-2 TE Connectivity Power Connector"
  rrect50% 2x1.524 hole 1.4: 1(0,0) 2(3.96,0)
  body extent -2.53,-4.7 6.53,5.8, height 16
618009231221 [mm] "9 pins, right angled, 8.08mm, with hex screw"
  rrect50% 1.6x1.6 hole 1.04: 1(-5.54,4.72)
  round 1.6 hole 1.04: 2(-2.77,4.72) 3(0,4.72) 4(2.77,4.72) 5(5.54,4.72) 6(-4.155,1.88) 7(-1.385,1.88) 8(1.385,1.88) 9(4.155,1.88)
  round 4.8 hole 3.2: M1(-12.5,3.3) M2(12.5,3.3)
  silkscreen extent -15.4,-6.2 15.4,6.2, body extent -15.4,-12.2 15.4,6.2, height 12.57
C0805FNPC-R#1 [mm]
  rect 0.9x1.3 smd mask+0.055: 1(-0.95,0) 2(0.95,0)
  silkscreen extent -0.15,-0.65 0.15,0.65, body extent -1.03,-0.63 0.97,0.63, height 0.96
C0805FNPC-R#2 [mm]
  rect 0.9x1.3 smd: 1(-0.95,0) 2(0.95,0)
  silkscreen extent -0.15,-0.65 0.15,0.65, body extent -1.03,-0.63 0.97,0.63, height 0.96
C0805FNPC-W [mm]
  rect 0.9x1.3 smd mask+0.055: 1(-1.15,0) 2(1.15,0)
  silkscreen extent -0.35,-0.65 0.35,0.65, body extent -1,-0.63 1,0.63, height 0.96
CUI_CMI-1275C-050 [mm]
  round 1.408 hole 0.9: N(3.8,0) P(-3.8,0)
  silkscreen extent -6,-6 6,6, body extent -6,-5.99 6,5.99, height 8.1
DTVS-DO-214AC [mm] "Molded Diode, 2-Leads, Body 5,11x2,67mm, IPC Medium Density"
  rrect50% 2.5x1.7 smd mask+0.055: 1(-1.975,0) 2(1.975,0)
  silkscreen extent -2.7,-1.4 3.47,1.52, body extent -2.56,-1.34 2.56,1.34, height 2.5
FP-105309-1102-MFG [mm]
  round 1.85 hole 1.2 paste-2539.97 mask+0: 1(-1.25,1.43) 2(1.25,1.43)
  round 1.3 hole 1.3 unplated paste-2539.97 mask+0: ""(0,0.09)
  silkscreen extent -3.75,-3.27 3.07,3.27, body extent -3.17,-3.37 3.17,3.37, height 0.25
FP-C04-057-OA-MFG [mm]
  rect 1.55x0.6 smd paste+0 mask+0.055: 1(-2.7,1.905) 2(-2.7,0.635) 3(-2.7,-0.635) 4(-2.7,-1.905) 5(2.7,-1.905) 6(2.7,-0.635) 7(2.7,0.635) 8(2.7,1.905)
  silkscreen extent -4.31,-2.5 1.5,2.92, body extent -3.57,-2.75 3.57,2.75, height 0.25
FP-CR0805-IPC_A [mm]
  rect 1.258x1.462 smd paste+0 mask+0.055: 1(-0.977,0) 2(0.977,0)
  silkscreen extent -1.61,-1.13 1.61,1.13, body extent -1,-0.63 1,0.63, height 0.6
FP-DLW32PH-MFG [mm]
  rect 1.05x0.6 smd paste+0 mask+0.055: 1(-1.525,0.5) 2(1.525,0.5) 3(1.525,-0.5) 4(-1.525,-0.5)
  silkscreen extent -2.72,-1.35 1.7,1.35, body extent -2.15,-1.45 2.15,1.45, height 0.25
FP-GRM32E-0_3-0_2-IPC_C [mm]
  rect 1.703x2.606 smd paste+0 mask+0.055: 1(-1.051,0) 2(1.051,0)
  silkscreen extent -1.9,-1.75 1.9,1.75, body extent -2,-1.45 2,1.45, height 0.25
FP-LQFP100-1L-IPC_A [mm]
  rect 1.955x0.312 smd paste+0 mask+0: 1(-7.675,6)
  rrect100% 1.955x0.312 smd paste+0 mask+0: 2(-7.675,5.5) 3(-7.675,5) 4(-7.675,4.5) 5(-7.675,4) 6(-7.675,3.5) 7(-7.675,3) 8(-7.675,2.5) 9(-7.675,2) 10(-7.675,1.5) 11(-7.675,1) 12(-7.675,0.5) 13(-7.675,0) 14(-7.675,-0.5) 15(-7.675,-1) 16(-7.675,-1.5) 17(-7.675,-2) 18(-7.675,-2.5) 19(-7.675,-3) 20(-7.675,-3.5) 21(-7.675,-4) 22(-7.675,-4.5) 23(-7.675,-5) 24(-7.675,-5.5) 25(-7.675,-6) 51(7.675,-6) 52(7.675,-5.5) 53(7.675,-5) 54(7.675,-4.5) 55(7.675,-4) 56(7.675,-3.5) 57(7.675,-3) 58(7.675,-2.5) 59(7.675,-2) 60(7.675,-1.5) 61(7.675,-1) 62(7.675,-0.5) 63(7.675,0) 64(7.675,0.5) 65(7.675,1) 66(7.675,1.5) 67(7.675,2) 68(7.675,2.5) 69(7.675,3) 70(7.675,3.5) 71(7.675,4) 72(7.675,4.5) 73(7.675,5) 74(7.675,5.5) 75(7.675,6)
  rrect100% 0.312x1.955 smd paste+0 mask+0: 26(-6,-7.675) 27(-5.5,-7.675) 28(-5,-7.675) 29(-4.5,-7.675) 30(-4,-7.675) 31(-3.5,-7.675) 32(-3,-7.675) 33(-2.5,-7.675) 34(-2,-7.675) 35(-1.5,-7.675) 36(-1,-7.675) 37(-0.5,-7.675) 38(0,-7.675) 39(0.5,-7.675) 40(1,-7.675) 41(1.5,-7.675) 42(2,-7.675) 43(2.5,-7.675) 44(3,-7.675) 45(3.5,-7.675) 46(4,-7.675) 47(4.5,-7.675) 48(5,-7.675) 49(5.5,-7.675) 50(6,-7.675) 76(6,7.675) 77(5.5,7.675) 78(5,7.675) 79(4.5,7.675) 80(4,7.675) 81(3.5,7.675) 82(3,7.675) 83(2.5,7.675) 84(2,7.675) 85(1.5,7.675) 86(1,7.675) 87(0.5,7.675) 88(0,7.675) 89(-0.5,7.675) 90(-1,7.675) 91(-1.5,7.675) 92(-2,7.675) 93(-2.5,7.675) 94(-3,7.675) 95(-3.5,7.675) 96(-4,7.675) 97(-4.5,7.675) 98(-5,7.675) 99(-5.5,7.675) 100(-6,7.675)
  silkscreen extent -7.8,-6.25 6.25,6.83, body extent -9.15,-9.15 9.15,9.15, height 0.25
FP-RN732A-IPC_B [mm]
  rect 1.106x1.408 smd paste+0 mask+0.055: 1(-0.876,0) 2(0.876,0)
  silkscreen extent -1.43,-1.1 1.43,1.1, body extent -1,-0.63 1,0.63, height 0.65
J_NanoFit_1x4_V [mm]
  round 1.4 hole 1.4: 0(0,-1.34)
  rect 1.8x1.8 hole 1.2: 1(3.75,0)
  round 1.8 hole 1.2: 2(1.25,0) 3(-1.25,0) 4(-3.75,0)
  silkscreen extent -5.5,-4.5 5.5,1.8, body extent -5.47,-4.65 5.47,1.69, height 10.68
J_STLink_PinHeader [mm] "Pin Header, pitch 2.54 mm, THT, Vertical, single row, 6p"
  rrect50% 1.6x1.6 hole 1.1: 1(-6.35,0)
  round 1.6 hole 1.1: 2(-3.81,0) 3(-1.27,0) 4(1.27,0) 5(3.81,0) 6(6.35,0)
  silkscreen extent -8.34,-1.35 7.77,1.35, body extent -7.62,-1.27 7.62,1.27, height 8.57
L_Ferrite_bead_0805 [mm] "Chip Inductor, 2-Leads, Body 1,60x0,80mm, IPC Low Density"
  rrect50% 1.22x1.08 smd mask+0.055: 1(-0.84,0) 2(0.84,0)
  body extent -0.88,-0.48 0.87,0.47, height 0.65
LDO_10V-0.8/3V3-SOT223 [mm] "SOT223, 4-Leads, Body 6,50x7,00mm (avg), Pitch 2,30mm, IPC Low Density"
  rrect50% 2.1x1 smd mask+0.055: 1(-3.15,2.3) 2(-3.15,0) 3(-3.15,-2.3)
  rrect50% 2.1x3.3 smd mask+0.055: 4(3.15,0)
  silkscreen extent -3.27,-3.35 1.8,3.47, body extent -3.5,-3.25 3.5,3.25, height 1.81
LED_0805_WE [mm] "SODFL, 2-Leads, Body 1,60x3,20mm, IPC Medium Density"
  rrect50% 1.1x1.2 smd mask+0.055: A(1.05,0) K(-1.05,0)
  silkscreen extent -2.15,1.05 -2.05,1.15, body extent -1,-0.62 1,0.63, height 0.7
Mounting_Hole_M4 [mm]
  round 7 all layers, no hole: 1(0,0)
  round 7 smd far side: 1(0,0)
MPQ4323 [mm] "36V-3A-DCDC-QFN_Footprint"
  rect 0.8x0.25 smd mask+0.055: 1(-0.85,1.125) 2(-0.85,0.475) 3(-0.85,-0.175) 4(-0.85,-0.675) 8(0.85,-0.675) 9(0.85,-0.175) 10(0.85,0.475) 11(0.85,1.125)
  rect 0.25x0.8 smd mask+0.055: 5(-0.5,-1.4) 6(0,-1.4) 7(0.5,-1.4)
  rect 0.25x1.8 smd mask+0.055: 12(0,0.9)
  silkscreen extent -1.97,-1.7 1.2,1.7, body extent -1.05,-1.55 1.05,1.55, height 1
MPQ4371-AEQ1 [mm] "QFN, 22-Leads, Body 4,00x5,00mm, Pitch 0,50mm/0,70mm, Thermal Pad 3,65x3,95mm, IPC Medium Density"
  round 0.025 smd mask+0.055: 1(-1.8,2.125) 6(-1.7,-2.125) 7(0,-1.65) 8(1.7,-2.125) 13(1.8,2.125)
  rect 0.95x0.3 smd mask+0.055: 2(-1.8,1.1) 3(-1.8,0.4) 5(-1.8,-1)
  rect 1.2x0.3 smd mask+0.055: 4(-1.675,-0.3) 10(1.675,-0.3)
  rect 0.9x0.3 smd mask+0.055: 9(1.8,-1) 11(1.8,0.4) 12(1.8,1.1)
  rect 0.25x1.05 smd mask+0.055: 14(1,2.275) 15(0.5,2.275) 16(0,2.275) 17(-0.5,2.275) 18(-1,2.275)
  Top Layer region: -0.379,-2.8 -0.379,-0.5 0.379,-0.5 0.379,-2.8 0.129,-2.8 0.129,-2.292 -0.121,-2.292 -0.125,-2.3 -0.125,-2.8
  Top Layer region: 1.348,1.471 1.348,2.779 1.748,2.779 1.748,2.206 2.248,2.206 2.248,1.956 1.752,1.956 1.752,1.702 2.252,1.702 2.252,1.475 2.248,1.471
  Top Layer region: -1.348,1.471 -1.348,2.779 -1.748,2.779 -1.748,2.206 -2.248,2.206 -2.248,1.956 -1.752,1.956 -1.752,1.702 -2.252,1.702 -2.252,1.475 -2.248,1.471
  Top Layer region: 1.091,-2.784 1.091,-1.465 2.291,-1.465 2.291,-1.715 1.779,-1.715 1.779,-1.969 2.308,-1.969 2.308,-2.223 1.599,-2.223 1.599,-2.784
  Top Layer region: -1.091,-2.784 -1.091,-1.465 -2.291,-1.465 -2.291,-1.715 -1.779,-1.715 -1.779,-1.969 -2.308,-1.969 -2.308,-2.223 -1.599,-2.223 -1.599,-2.784
  silkscreen extent -3.17,-2.95 2.45,3.17, body extent -2.05,-2.55 2.05,2.55, height 0.8
"Portapilas CR1220-Footprint-1" [mm]
  rrect50% 4.4x2.8 smd mask+0.055: 1(7.6,0) 2(-7.6,0)
  silkscreen extent -7.4,-7.71 8.3,7.71, body extent -7.76,-7.76 8.26,7.76, height 4.1
QFN127P600-8N [mm]
  rect 0.85x0.25 smd mask+0.055: 1(-1.4,2) 2(-1.4,1.5) 3(-1.4,1) 4(-1.4,0.5) 5(-1.4,0) 6(-1.4,-0.5) 7(-1.4,-1) 8(-1.4,-1.5) 9(-1.4,-2) 12(1.4,-2) 13(1.4,-1.5) 14(1.4,-1) 15(1.4,-0.5) 16(1.4,0) 17(1.4,0.5) 18(1.4,1) 19(1.4,1.5) 20(1.4,2)
  rect 0.25x0.8 smd mask+0.055: 10(-0.5,-2.4) 11(0.5,-2.4)
  rect 1x0.25 smd mask+0.055: 21(0,-1.6) 22(0,-0.7) 23(0,0.2) 24(0,1.1)
  round 0.025 smd mask+0.055: 25(0,2.125)
  Top Layer region: -0.62,1.875 -0.62,2.8 -0.37,2.8 -0.367,2.125 0.367,2.125 0.371,2.129 0.367,2.804 0.371,2.8 0.625,2.8 0.625,1.875
  silkscreen extent -2.47,-2.7 1.7,2.7, body extent -1.55,-2.55 1.55,2.55, height 1
R0805FTK [mm] "Chip Resistor, 2-Leads, Body 2,00x1,25mm, IPC Medium Density"
  rect 1.15x1.35 smd mask+0.055: 1(-0.925,0) 2(0.925,0)
  body extent -1,-0.63 1,0.63, height 0.65
RESC2012X10N [mm] "Chip Resistor, 2-Leads, Body 2,00x1,25mm, IPC Medium Density"
  rect 1x1.3 smd mask+0.055: 1(-1,0) 2(1,0)
  body extent -1.1,-0.7 1.1,0.7, height 0.95
RESC2013X50X30ML20T20 [mm] "Chip Resistor, 2-Leads, Body 2.00x1.25mm, IPC Low Density"
  rect 1.25x1.55 smd mask+0.055: 1(-1.025,0) 2(1.025,0)
  silkscreen extent -0.1,-0.67 0.1,0.67, body extent -1.1,-0.72 1.1,0.72, height 0.5
RESC2013X70X40NL20T20 [mm] "Chip Resistor, 2-Leads, Body 2.00x1.25mm, IPC Medium Density"
  rect 1.15x1.45 smd mask+0.055: 1(-0.875,0) 2(0.875,0)
  body extent -1.1,-0.72 1.1,0.72, height 0.7
SOT95P245X110-3N [mm] "SOT23, 3-Leads, Body 2,90x2,45mm, Pitch 0,95mm, IPC Medium Density"
  rect 1x0.6 smd mask+0.055: D(1.2,0) G(-1.2,0.95) S(-1.2,-0.95)
  silkscreen extent -1.32,-1.5 0.7,1.92, body extent -1.3,-1.5 1.3,1.5, height 1.1
TestPoint [mm]
  round 2 smd mask+0.055: 1(0,0)
TRT-NPN-0.5/45-SOT23 [mm] "SOT23, 3-Leads, Body 2,92x2,37mm, Pitch 0,95mm, IPC Low Density"
  rrect50% 1.2x0.65 smd mask+0.055: B(-1.3,0.95) C(1.3,0) E(-1.3,-0.95)
  silkscreen extent -1.42,-1.5 0.7,1.95, body extent -1.18,-1.46 1.19,1.46, height 1.12
WCAP-ASLI_D6.3H7.7 [mm] "Aluminium Electrolytic V-Chip SMT Capacitors, 6.3x7.7mm"
  rect 3.5x1.6 smd mask+0.055: 1(2.8,0) 2(-2.8,0)
  silkscreen extent -3.4,-3.4 3.4,3.4, body extent -3.65,-3.3 3.65,3.3, height 7.7
WCAP-CSGP_0805_L2W1.25H0.6_Reflow [mm] "Ceramic Capacitors, body 2x1.25mm"
  rect 0.9x1.3 smd mask+0.055: 1(-0.95,0) 2(0.95,0)
  body extent -1,-0.63 1,0.63, height 0.6
WCAP-CSGP_0805_L2W1.25H0.8_Reflow [mm] "Ceramic Capacitors, body 2x1.25mm"
  rect 0.9x1.3 smd mask+0.055: 1(-0.95,0) 2(0.95,0)
  body extent -1,-0.62 1,0.63, height 0.8
WE-HCI_1030 [mm] "SMT Flat Wire High Current Inductor, body 10.6x10.6mm"
  rect 3.5x3.8 smd mask+0.055: 1(-1270,-1266.15) 2(-1270,-1273.85)
  silkscreen extent -1275.45,-1275.5 -1264.55,-1264.5, body extent -1275.3,-1275.3 -1264.7,-1264.7, height 2.81
WE-PD_7345 [mm] "SMT Shielded Power Inductor, 2-leads, body 7.3x7.3mm"
  rect 1.6x2.2 smd mask+0.055: 1(-3.2,0) 2(3.2,0)
  Top Layer keep-out region: -3.65,-3.65 -3.65,-1.3 -2.2,-1.3 -2.2,1.3 -3.65,1.3 -3.65,3.65 3.65,3.65 3.65,1.3 2.2,1.3 2.2,-1.3 3.65,-1.3 3.65,-3.65
  silkscreen extent -4.62,-3.75 3.75,3.75, body extent -3.65,-3.65 3.65,3.65, height 3.91
WE-TVSP_DO-214AC_Bidirectional [mm] "Power TVS Diode, 2-Leads. body 4.24x2.67mm"
  rect 2.3x1.7 smd mask+0.055: 1(-2.1,0) 2(2.1,0)
  silkscreen extent -2.25,-1.4 2.25,1.4, body extent -2.56,-1.33 2.56,1.34, height 2.24
WE-XTAL_CFPX-104 [mm] "Quartz Crystal, size CFPX-104, body 5x3.2mm"
  rect 1.6x1.4 smd mask+0.055: 1(-1.9,-1.15) 2(1.9,-1.15) 3(1.9,1.15) 4(-1.9,1.15)
  silkscreen extent -3.24,-1.65 0.8,1.65, body extent -2.5,-1.6 2.5,1.6, height 0.95
XTAL_ABS06-32.768KHZ-9-T [mm]
  rect 0.75x1.4 smd mask+0.055: 1(-0.725,0) 2(0.725,0)
  body extent -1,-0.6 1,0.6, height 0.61

## Part data
C101: library part CMP-001-00011-2, "Ceramic Capacitor, Ceramic. 885012207096", Capacitor Type=Ceramic, Pins=2, RoHS Compliant=Yes
C102 C103 C106 C107 C112 C113 C115 C116 C501 C502 C504 C505: library part CMP-001-00003-2, "Ceramic Capacitor, Multilayer, Ceramic, 10V, 10% +Tol, 10% -Tol, X6S, 22% TC, 47uF, Surface Mount, 1210", Capacitor Type=Ceramic, Case/Package=1210, Max Operating Temperature=105°C, Min Operating Temperature=-55°C, Mounting Technology="Surface Mount", Pins=2, RoHS Compliant=Yes
C104: library part CMP-002-00006-1, "WCAP-ASLI Aluminum Electrolytic Capacitor, V-Chip, D6.3 x H7.7mm, 68uF, 35V", Capacitance Tolerance=+/-20%, Leakage Current=23.8uA, Manufacturer="Wurth Elektronik", Operating Temperature Max=105°C, Operating Temperature Min=-55°C, Rated Voltage (DC)=35V, Ripple Current=265mA, Category="Aluminum Electrolytic Capacitors", Component Type=Standard, ComponentLink1Description="Website Link", ComponentLink1URL=https://www.we-online.com/redexpert/article/865080545011?ad, ComponentLink2Description="Datasheet Link", ComponentLink2URL=https://www.we-online.com/redexpert/spec/865080545011?ad, Design Item ID=865080545011, Diameter=6.3mm, Dissipation Factor=14%, Endurance=2000h, Height=7.7mm, Manufacturer Part Number=865080545011, Match Code=WCAP-ASLI, Mount="Surface Mount", Packaging="Tape and Reel", Pins=2, Source=WCAP-ASLI.SchLib, Technical Reference=ASED077680M035DVCTCB000
C105: library part CMP-001-00012-1, "Ceramic Capacitor, Multilayer, Ceramic, 50V, 5% +Tol, 5% -Tol, C0G, 30ppm/Cel TC, 0.00001uF, Surface Mount, 0805", Capacitor Type=Ceramic, Pins=2, RoHS Compliant=Yes
C108 C109 C117 C118 C203 C204 C207 C208 C209 C210 C211 C212 C213 C401 C409 C411 C418 C503 C508 C601 C602 C605: library part CMP-00063-1, "Cap, 0.1ΜF, 50V, 10%, X7R, 0805", Case Code (Metric)=2012, Case/Package=0805, Dielectric=X7R, Manufacturer 1="Wurth Electronics", Manufacturer Part Number 1=885012207098, Max Operating Temperature=125°C, Min Operating Temperature=-55°C, Tolerance=10%, Voltage Rating=50V, .Creator=DR, Category="Ceramic Capacitors", ComponentLink1Description=http://www.farnell.com/datasheets/1958498.pdf?src-supplier=Farnell, ComponentLink1URL=http://www.farnell.com/datasheets/1958498.pdf?src-supplier=Farnell, ComponentLink2Description=http://www.farnell.com/datasheets/1958498.pdf?src-supplier=Element14, ComponentLink2URL=http://www.farnell.com/datasheets/1958498.pdf?src-supplier=Element14, ComponentLink3Description=https://katalog.we-online.de/pbs/datasheet/885012207098.pdf?src-supplier=Digi-Key, ComponentLink3URL=https://katalog.we-online.de/pbs/datasheet/885012207098.pdf?src-supplier=Digi-Key, ComponentLink4Description=http://www.farnell.com/datasheets/1958498.pdf?src-supplier=Newark, ComponentLink4URL=http://www.farnell.com/datasheets/1958498.pdf?src-supplier=Newark, Design Item ID=C100n-50V-0805FNPC-X7R, Length=0.079inch, Mount="Surface Mount", Packaging="Cut Tape", Pricing 1="100=0,10200, 500=0,07100, 2000=0,06100 (GBP)", REACH SVHC=Unknown, RoHS=Yes, RoHS Compliant=Yes, Source=Passives.SchLib, Stock 1=8000, Thickness=0.035inch, Voltage Rating (DC)=50V, Width=0.049inch
C110 C119 C408 C420: library part CMP-00052-1, "Multilayer Ceramic Capacitor, Wcap-Csgp Series, 1 F, 10%, X7R, 50 V, 0805 [2012 Metric] Rohs Compliant: Yes", Case Code (Metric)=2012, Case/Package=0805, Dielectric=X7R, Manufacturer 1="Wurth Electronics", Manufacturer Part Number 1=885012207103, Max Operating Temperature=85°C, Min Operating Temperature=-55°C, Tolerance=10%, Voltage Rating=50V, .Creator=GP, Category="Ceramic Capacitors", ComponentLink1Description=http://www.farnell.com/datasheets/1958501.pdf?src-supplier=Farnell, ComponentLink1URL=http://www.farnell.com/datasheets/1958501.pdf?src-supplier=Farnell, ComponentLink2Description=http://www.farnell.com/datasheets/1958501.pdf?src-supplier=Element14, ComponentLink2URL=http://www.farnell.com/datasheets/1958501.pdf?src-supplier=Element14, ComponentLink3Description=https://katalog.we-online.de/pbs/datasheet/885012107003.pdf?src-supplier=Digi-Key, ComponentLink3URL=https://katalog.we-online.de/pbs/datasheet/885012107003.pdf?src-supplier=Digi-Key, ComponentLink4Description=http://www.farnell.com/datasheets/1958501.pdf?src-supplier=Newark, ComponentLink4URL=http://www.farnell.com/datasheets/1958501.pdf?src-supplier=Newark, Design Item ID=C1u-50V-0805FNPC-X7R, Length=0.079inch, Mount="Surface Mount", Packaging="Cut Tape", Pricing 1="50=0,27200, 250=0,25300, 500=0,22800, 1250=0,20100, 2500=0,17100 (GBP)", REACH SVHC=Unknown, RoHS=Yes, RoHS Compliant=Yes, Source=Passives.SchLib, Stock 1=5100, Thickness=0.053inch, Voltage Rating (DC)=50V, Width=0.049inch
C111: library part CMP-001-00011-1, "Ceramic Capacitor, Ceramic", Capacitor Type=Ceramic, Pins=2, RoHS Compliant=Yes
C114 C205 C206 C214 C215: library part CMP-001-00012-2, "Ceramic Capacitor, Multilayer, Ceramic, 50V, 5% +Tol, 5% -Tol, C0G, 30ppm/Cel TC, 0.00001uF, Surface Mount, 0805. 885012007051", Capacitor Type=Ceramic, Pins=2, RoHS Compliant=Yes
C120 C121: library part CMP-00055-6, "Multilayer Ceramic Capacitor, Wcap-Csgp Series, 10 F, 20%, X5R, 16 V, 0805 [2012 Metric] Rohs Compliant: Yes", Case Code (Metric)=2012, Case/Package=0805, Dielectric=X5R, Manufacturer 1="Wurth Electronics", Manufacturer Part Number 1=885012107014, Max Operating Temperature=85°C, Min Operating Temperature=-55°C, Tolerance=20%, Voltage Rating=16V, .Creator=DR, Category="Ceramic Capacitors", ComponentLink1Description=http://www.farnell.com/datasheets/1958454.pdf?src-supplier=Farnell, ComponentLink1URL=http://www.farnell.com/datasheets/1958454.pdf?src-supplier=Farnell, ComponentLink2Description=http://www.farnell.com/datasheets/1958454.pdf?src-supplier=Element14, ComponentLink2URL=http://www.farnell.com/datasheets/1958454.pdf?src-supplier=Element14, ComponentLink3Description=https://katalog.we-online.de/pbs/datasheet/885012107014.pdf?src-supplier=Digi-Key, ComponentLink3URL=https://katalog.we-online.de/pbs/datasheet/885012107014.pdf?src-supplier=Digi-Key, ComponentLink4Description=http://www.farnell.com/datasheets/1958454.pdf?src-supplier=Newark, ComponentLink4URL=http://www.farnell.com/datasheets/1958454.pdf?src-supplier=Newark, Design Item ID=C10u-16V-0805FNPC-X5R, Length=0.079inch, Mount="Surface Mount", Packaging="Cut Tape", Pricing 1="50=0,21000, 250=0,20200, 500=0,19100, 1000=0,17400, 2500=0,14700 (GBP)", REACH SVHC=Unknown, RoHS=Yes, RoHS Compliant=Yes, Source=Passives.SchLib, Stock 1=81550, Thickness=0.057inch, Voltage Rating (DC)=16V, Width=0.049inch
C201 C202: library part CMP-00058-1, "Multilayer Ceramic Capacitor, Wcap-Csgp Series, 22 F, 20%, X5R, 10 V, 0805 [2012 Metric] Rohs Compliant: Yes", Case Code (Metric)=2012, Case/Package=0805, Dielectric=X5R, Manufacturer="Wurth Electronics", Manufacturer Part Number=885012107011, Max Operating Temperature=85°C, Min Operating Temperature=-55°C, Tolerance=20%, Voltage Rating=10V, .Creator=DR, Category="Ceramic Capacitors", ComponentLink1Description=http://www.farnell.com/datasheets/1958453.pdf?src-supplier=Farnell, ComponentLink1URL=http://www.farnell.com/datasheets/1958453.pdf?src-supplier=Farnell, ComponentLink2Description=http://www.farnell.com/datasheets/1958453.pdf?src-supplier=Newark, ComponentLink2URL=http://www.farnell.com/datasheets/1958453.pdf?src-supplier=Newark, ComponentLink3Description=http://www.farnell.com/datasheets/1958453.pdf?src-supplier=Element14, ComponentLink3URL=http://www.farnell.com/datasheets/1958453.pdf?src-supplier=Element14, ComponentLink4Description=https://katalog.we-online.de/pbs/datasheet/885012107011.pdf?src-supplier=Digi-Key, ComponentLink4URL=https://katalog.we-online.de/pbs/datasheet/885012107011.pdf?src-supplier=Digi-Key, ComponentLink5Description="Where buy it", ComponentLink5URL=https://www.we-online.com/catalog/en/WCAP-CSGP-10VDC#885012107011, Design Item ID=C22u-10V-0805FNPC-X5R, Length=0.079inch, Mount="Surface Mount", Packaging="Cut Tape", Pricing 1="20=0,15300, 100=0,40300, 200=0,37700, 500=0,35100, 1000=0,31700 (GBP)", REACH SVHC=Unknown, RoHS=Yes, RoHS Compliant=Yes, Source=Passives.SchLib, Stock 1=8800, Thickness=0.057inch, Voltage Rating (DC)=10V, Width=0.049inch
C402 C403 C404 C405 C406 C407 C412 C413 C414 C415 C416 C417: library part CMP-001-00003-1, "Ceramic Capacitor, Multilayer, Ceramic, 10V, 10% +Tol, 10% -Tol, X6S, 22% TC, 47uF, Surface Mount, 1210", Capacitor Type=Ceramic, Case/Package=1210, Max Operating Temperature=105°C, Min Operating Temperature=-55°C, Mounting Technology="Surface Mount", Pins=2, RoHS Compliant=Yes
C410 C419: library part CMP-00068-3, "Multilayer Ceramic Capacitor, Wcap-Csgp Series, 100 Pf, 5%, C0G / Np0, 50 V, 0805 [2012 Metric] Rohs Compliant: Yes", Case Code (Metric)=2012, Case/Package=0805, Dielectric=C0G, Manufacturer="Wurth Electronics", Manufacturer Part Number=885012007057, Max Operating Temperature=125°C, Min Operating Temperature=-55°C, Tolerance=5%, Voltage Rating=50V, .Creator=DR, Category="Ceramic Capacitors", ComponentLink1Description=http://www.farnell.com/datasheets/1958443.pdf?src-supplier=Farnell, ComponentLink1URL=http://www.farnell.com/datasheets/1958443.pdf?src-supplier=Farnell, ComponentLink2Description=https://katalog.we-online.de/pbs/datasheet/885012007057.pdf?src-supplier=Digi-Key, ComponentLink2URL=https://katalog.we-online.de/pbs/datasheet/885012007057.pdf?src-supplier=Digi-Key, ComponentLink3Description=http://www.farnell.com/datasheets/1958443.pdf?src-supplier=Element14, ComponentLink3URL=http://www.farnell.com/datasheets/1958443.pdf?src-supplier=Element14, ComponentLink4Description=http://www.farnell.com/datasheets/1958443.pdf?src-supplier=Newark, ComponentLink4URL=http://www.farnell.com/datasheets/1958443.pdf?src-supplier=Newark, ComponentLink5Description="Where buy it", ComponentLink5URL=https://www.we-online.com/catalog/en/WCAP-CSGP-50VDC#885012007057, Design Item ID=C100p-50V-0805FNPC-C0G/NP0, Length=0.079inch, Mount="Surface Mount", Packaging="Cut Tape", Pricing 1="4000=0,03900, 12000=0,03800 (USD)", REACH SVHC=Unknown, RoHS=Yes, RoHS Compliant=Yes, Source=Passives.SchLib, Stock 1=1, Thickness=0.035inch, Voltage Rating (DC)=50V, Width=0.049inch
C421 C422: library part CMP-00056-3, "Cap, 15PF, 50V, 5%, C0G/NP0, 0805", Case Code (Metric)=2012, Case/Package=0805, Manufacturer 1="Wurth Electronics", Manufacturer Part Number 1=885012007052, Max Operating Temperature=125°C, Min Operating Temperature=-55°C, Tolerance=5%, Voltage Rating=50V, .Creator=DR, Category="Ceramic Capacitors", ComponentLink1Description=http://www.farnell.com/datasheets/2031702.pdf?src-supplier=Farnell, ComponentLink1URL=http://www.farnell.com/datasheets/2031702.pdf?src-supplier=Farnell, ComponentLink2Description=http://katalog.we-online.de/pbs/datasheet/885012007052.pdf?src-supplier=Digi-Key, ComponentLink2URL=http://katalog.we-online.de/pbs/datasheet/885012007052.pdf?src-supplier=Digi-Key, ComponentLink3Description=https://katalog.we-online.de/pbs/datasheet/885012007052.pdf?src-supplier=Digi-Key, ComponentLink3URL=https://katalog.we-online.de/pbs/datasheet/885012007052.pdf?src-supplier=Digi-Key, Design Item ID=C15p-50V-0805FNPC-NP0, Length=0.079inch, Mount="Surface Mount", Packaging="Cut Tape", Pricing 1="1=0,10800, 10=0,05200, 25=0,05100, 50=0,04900, 100=0,04800, 250=0,04600, 500=0,04300 (USD)", RoHS=Yes, RoHS Compliant=Yes, Source=Passives.SchLib, Stock 1=815, Thickness=0.028inch, Width=0.049inch
C506: library part CMP-00048-1, "Cap Ceramic 0.22uF 50V X5R 10% Pad SMD 0805 85C Low ESR Automotive T/R", Case Code (Metric)=2012, Case/Package=0805, Dielectric=X5R, Manufacturer="Taiyo Yuden", Manufacturer Part Number=UMK212BJ224KGHT, Max Operating Temperature=85°C, Min Operating Temperature=-55°C, Package Quantity=3000, Ratings=AEC-Q200, Tolerance=10%, Voltage Rating=50V, .Creator=DR, Category=Capacitor, ComponentLink1Description=Datasheet, ComponentLink1URL=https://eu.mouser.com/datasheet/2/396/taiyo_yuden_12132018_mlcc11_hq_e-1510082.pdf, ComponentLink2Description="Where buy it", ComponentLink2URL=https://eu.mouser.com/ProductDetail/Taiyo-Yuden/UMK212BJ224KGHT?qs=CNQs48zzdnpf%2FbZJTfp33Q%3D%3D, Design Item ID=C0.22u-0805FNPC-X5R, Halogen Free="Halogen Free", Height=1.25mm, Lead Free="Lead Free", Length=0.079inch, Mount="Surface Mount", Packaging="Tape and Reel", Pricing 1="1=0,20000, 10=0,13700, 50=0,08220, 100=0,06950, 500=0,04754, 1000=0,04206 (USD)", RoHS=Yes, RoHS Compliant=Yes, Source=Passives.SchLib, Stock 1=900, Termination=SMD/SMT, Thickness=0.053inch, Voltage Rating (DC)=50V, Width=0.049inch
C507: library part CMP-00053-1, "Cap, 0.01ΜF, 50V, 10%, X7R, 0805", Case Code (Metric)=2012, Case/Package=0805, Dielectric=X7R, Manufacturer 1="Wurth Electronics", Manufacturer Part Number 1=885012207092, Max Operating Temperature=125°C, Min Operating Temperature=-55°C, Tolerance=10%, Voltage Rating=50V, .Creator=DR, Category="Ceramic Capacitors", ComponentLink1Description=http://www.farnell.com/datasheets/1958497.pdf?src-supplier=Farnell, ComponentLink1URL=http://www.farnell.com/datasheets/1958497.pdf?src-supplier=Farnell, ComponentLink2Description=http://www.farnell.com/datasheets/1958497.pdf?src-supplier=Element14, ComponentLink2URL=http://www.farnell.com/datasheets/1958497.pdf?src-supplier=Element14, ComponentLink3Description=http://www.farnell.com/datasheets/1958497.pdf?src-supplier=Newark, ComponentLink3URL=http://www.farnell.com/datasheets/1958497.pdf?src-supplier=Newark, ComponentLink4Description=https://katalog.we-online.de/pbs/datasheet/885012207092.pdf?src-supplier=Digi-Key, ComponentLink4URL=https://katalog.we-online.de/pbs/datasheet/885012207092.pdf?src-supplier=Digi-Key, Design Item ID=C10n-50V-0805FNPC-X7R, Length=0.079inch, Mount="Surface Mount", Packaging="Cut Tape", Pricing 1="4000=0,03200, 12000=0,03100 (USD)", REACH SVHC=Unknown, RoHS=Yes, RoHS Compliant=Yes, Source=Passives.SchLib, Stock 1=1, Thickness=0.035inch, Voltage Rating (DC)=50V, Width=0.049inch
C603 C604 C606 C607 C608: library part CMP-00068-1, "Multilayer Ceramic Capacitor, Wcap-Csgp Series, 100 Pf, 5%, C0G / Np0, 50 V, 0805 [2012 Metric] Rohs Compliant: Yes", Case Code (Metric)=2012, Case/Package=0805, Dielectric=C0G, Manufacturer="Wurth Electronics", Manufacturer Part Number=885012007057, Max Operating Temperature=125°C, Min Operating Temperature=-55°C, Tolerance=5%, Voltage Rating=50V, .Creator=DR, Category="Ceramic Capacitors", ComponentLink1Description=http://www.farnell.com/datasheets/1958443.pdf?src-supplier=Farnell, ComponentLink1URL=http://www.farnell.com/datasheets/1958443.pdf?src-supplier=Farnell, ComponentLink2Description=https://katalog.we-online.de/pbs/datasheet/885012007057.pdf?src-supplier=Digi-Key, ComponentLink2URL=https://katalog.we-online.de/pbs/datasheet/885012007057.pdf?src-supplier=Digi-Key, ComponentLink3Description=http://www.farnell.com/datasheets/1958443.pdf?src-supplier=Element14, ComponentLink3URL=http://www.farnell.com/datasheets/1958443.pdf?src-supplier=Element14, ComponentLink4Description=http://www.farnell.com/datasheets/1958443.pdf?src-supplier=Newark, ComponentLink4URL=http://www.farnell.com/datasheets/1958443.pdf?src-supplier=Newark, ComponentLink5Description="Where buy it", ComponentLink5URL=https://www.we-online.com/catalog/en/WCAP-CSGP-50VDC#885012007057, Design Item ID=C100p-50V-0805FNPC-C0G/NP0, Length=0.079inch, Mount="Surface Mount", Packaging="Cut Tape", Pricing 1="4000=0,03900, 12000=0,03800 (USD)", REACH SVHC=Unknown, RoHS=Yes, RoHS Compliant=Yes, Source=Passives.SchLib, Stock 1=1, Thickness=0.035inch, Voltage Rating (DC)=50V, Width=0.049inch
D101: library part CMP-004-00003-1, "Trans Voltage Suppressor Diode, 400W, Bidirectional, 1 Element, Silicon, DO-214AC", Max Operating Temperature=150°C, Min Operating Temperature=-65°C, Pins=2, RoHS Compliant=Yes
D102 D103 D104: library part LEDVS-0805-40, "Led, Green, 570 Nm, 2 V, 30 Ma, 40 Mcd Rohs Compliant: Yes", Case Code (Imperial)=0805, Case Code (Metric)=2012, Color=Green, Forward Current=30mA, Forward Voltage=2V, Manufacturer 1="Wurth Electronics", Max Operating Temperature=85°C, Min Operating Temperature=-40°C, Package Quantity=4000, Supplier Part Number 1=8154237, Test Current=20mA, .Creator=DR, Case/Package=0805, Category=LEDs, ComponentLink1Description=Datasheet, ComponentLink1URL=https://www.we-online.com/catalog/datasheet/150080VS75000.pdf, ComponentLink2Description="Where buy it", ComponentLink2URL=https://katalog.we-online.de/en/led/WL-SMCW/150080VS75000, ComponentLink3Description=https://datasheet.ciiva.com/22656/150080vs75000-22656966.pdf?src-supplier=Element14, ComponentLink3URL=https://datasheet.ciiva.com/22656/150080vs75000-22656966.pdf?src-supplier=Element14, ComponentLink4Description=https://datasheet.ciiva.com/29279/759437-da-01-en-chipled-0805-w-kl-h-gruen-150080vs7500-29279047.pdf?src-supplier=Conrad, ComponentLink4URL=https://datasheet.ciiva.com/29279/759437-da-01-en-chipled-0805-w-kl-h-gruen-150080vs7500-29279047.pdf?src-supplier=Conrad, ComponentLink5Description=https://datasheet.ciiva.com/29563/150080vs75000-29563018.pdf?src-supplier=Digi-Key, ComponentLink5URL=https://datasheet.ciiva.com/29563/150080vs75000-29563018.pdf?src-supplier=Digi-Key, Dominant Wavelength=570nm, Height=0.7mm, Length=2mm, Lens Style=Clear,Rectangular, Luminous Intensity=40mcd, Manufacturer Part Number 1=150080VS75000, Mount="Surface Mount", Packaging="Tape and Reel", Pricing 1="50=0,19300, 500=0,12900, 1000=0,12300, 2000=0,11700, 4000=0,11100 (USD)", REACH SVHC=Unknown, RoHS=Yes, Stock 1=850, Supplier 1=RSComponents, Viewing Angle=140°, Wavelength=570nm, Width=1.25mm
D201 D202 D203 D204: library part CMP-00129-1, "LED BLUE CLEAR 0805 SMD", Case Code (Imperial)=0805, Case Code (Metric)=2012, Color=Blue, Forward Current=30mA, Forward Voltage=3.2V, Manufacturer 1="Wurth Electronics", Manufacturer Part Number 1=150080BS75000, Max Operating Temperature=85°C, Min Operating Temperature=-40°C, Package Quantity=4000, Test Current=20mA, .Creator=GP, Case/Package=0805, Category=LEDs, ComponentLink1Description=Datasheet, ComponentLink1URL=https://www.we-online.com/catalog/datasheet/150080BS75000.pdf, ComponentLink2Description="Where buy it", ComponentLink2URL=https://katalog.we-online.de/en/led/WL-SMCW/150080BS75000, ComponentLink3Description=https://datasheet.ciiva.com/23843/150080bs75000-23843251.pdf?src-supplier=Newark, ComponentLink3URL=https://datasheet.ciiva.com/23843/150080bs75000-23843251.pdf?src-supplier=Newark, ComponentLink4Description=https://datasheet.ciiva.com/22656/1740214-22656954.pdf?src-supplier=Element14, ComponentLink4URL=https://datasheet.ciiva.com/22656/1740214-22656954.pdf?src-supplier=Element14, ComponentLink5Description=https://datasheet.ciiva.com/29279/759433-da-01-en-chipled-0805-w-kl-blau-150080bs75000-29279203.pdf?src-supplier=Conrad, ComponentLink5URL=https://datasheet.ciiva.com/29279/759433-da-01-en-chipled-0805-w-kl-blau-150080bs75000-29279203.pdf?src-supplier=Conrad, ComponentLink6Description=https://datasheet.ciiva.com/29562/150080bs75000-29562922.pdf?src-supplier=Digi-Key, ComponentLink6URL=https://datasheet.ciiva.com/29562/150080bs75000-29562922.pdf?src-supplier=Digi-Key, ComponentLink7Description=https://datasheet.ciiva.com/29562/150080bs75000-29562923.pdf?src-supplier=Digi-Key, ComponentLink7URL=https://datasheet.ciiva.com/29562/150080bs75000-29562923.pdf?src-supplier=Digi-Key, Design Item ID=LEDBS-0805-145, Dominant Wavelength=470nm, Height=0.7mm, Lead Free="Lead Free", Length=2mm, Lens Style=Clear,Rectangular, Luminous Intensity=145mcd, Mount="Surface Mount", Packaging="Tape and Reel", Pricing 1="50=0,19300, 500=0,12900, 1000=0,12200, 2000=0,11700, 4000=0,11100 (USD)", REACH SVHC=Unknown, RoHS=Yes, RoHS Compliant=Yes, Source=Semiconductor.SchLib, Stock 1=7400, Viewing Angle=140°, Wavelength=470nm, Width=1.25mm